# EAGLE board ARK+DOS+DA+SC (EAGLE 9.4.2), part 1 of 2
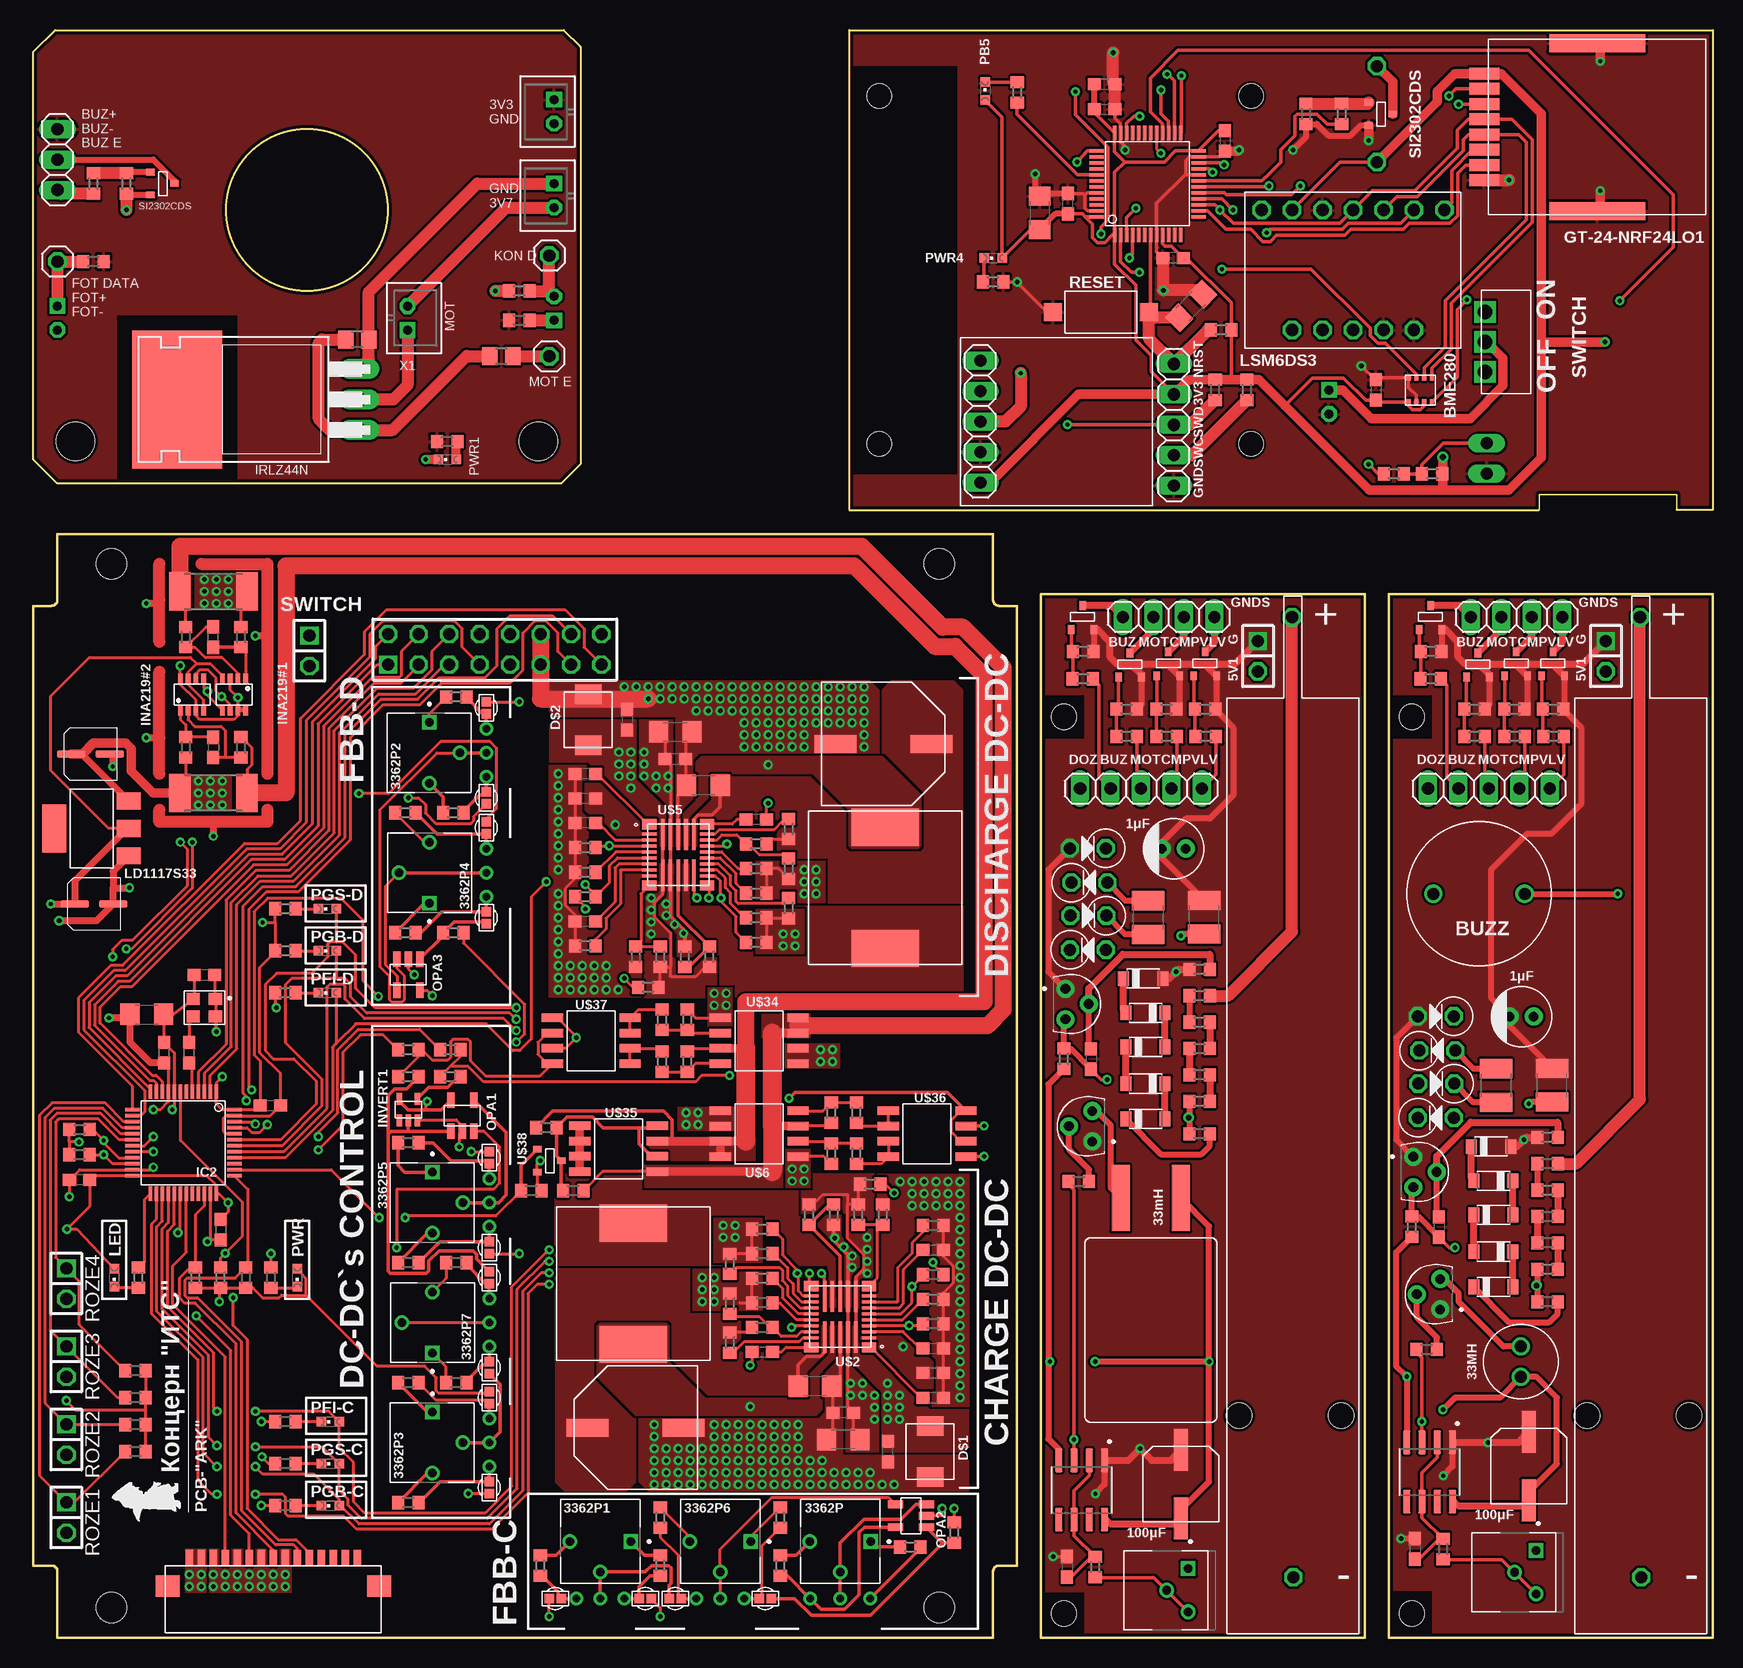
[diagram p0: board, top side]
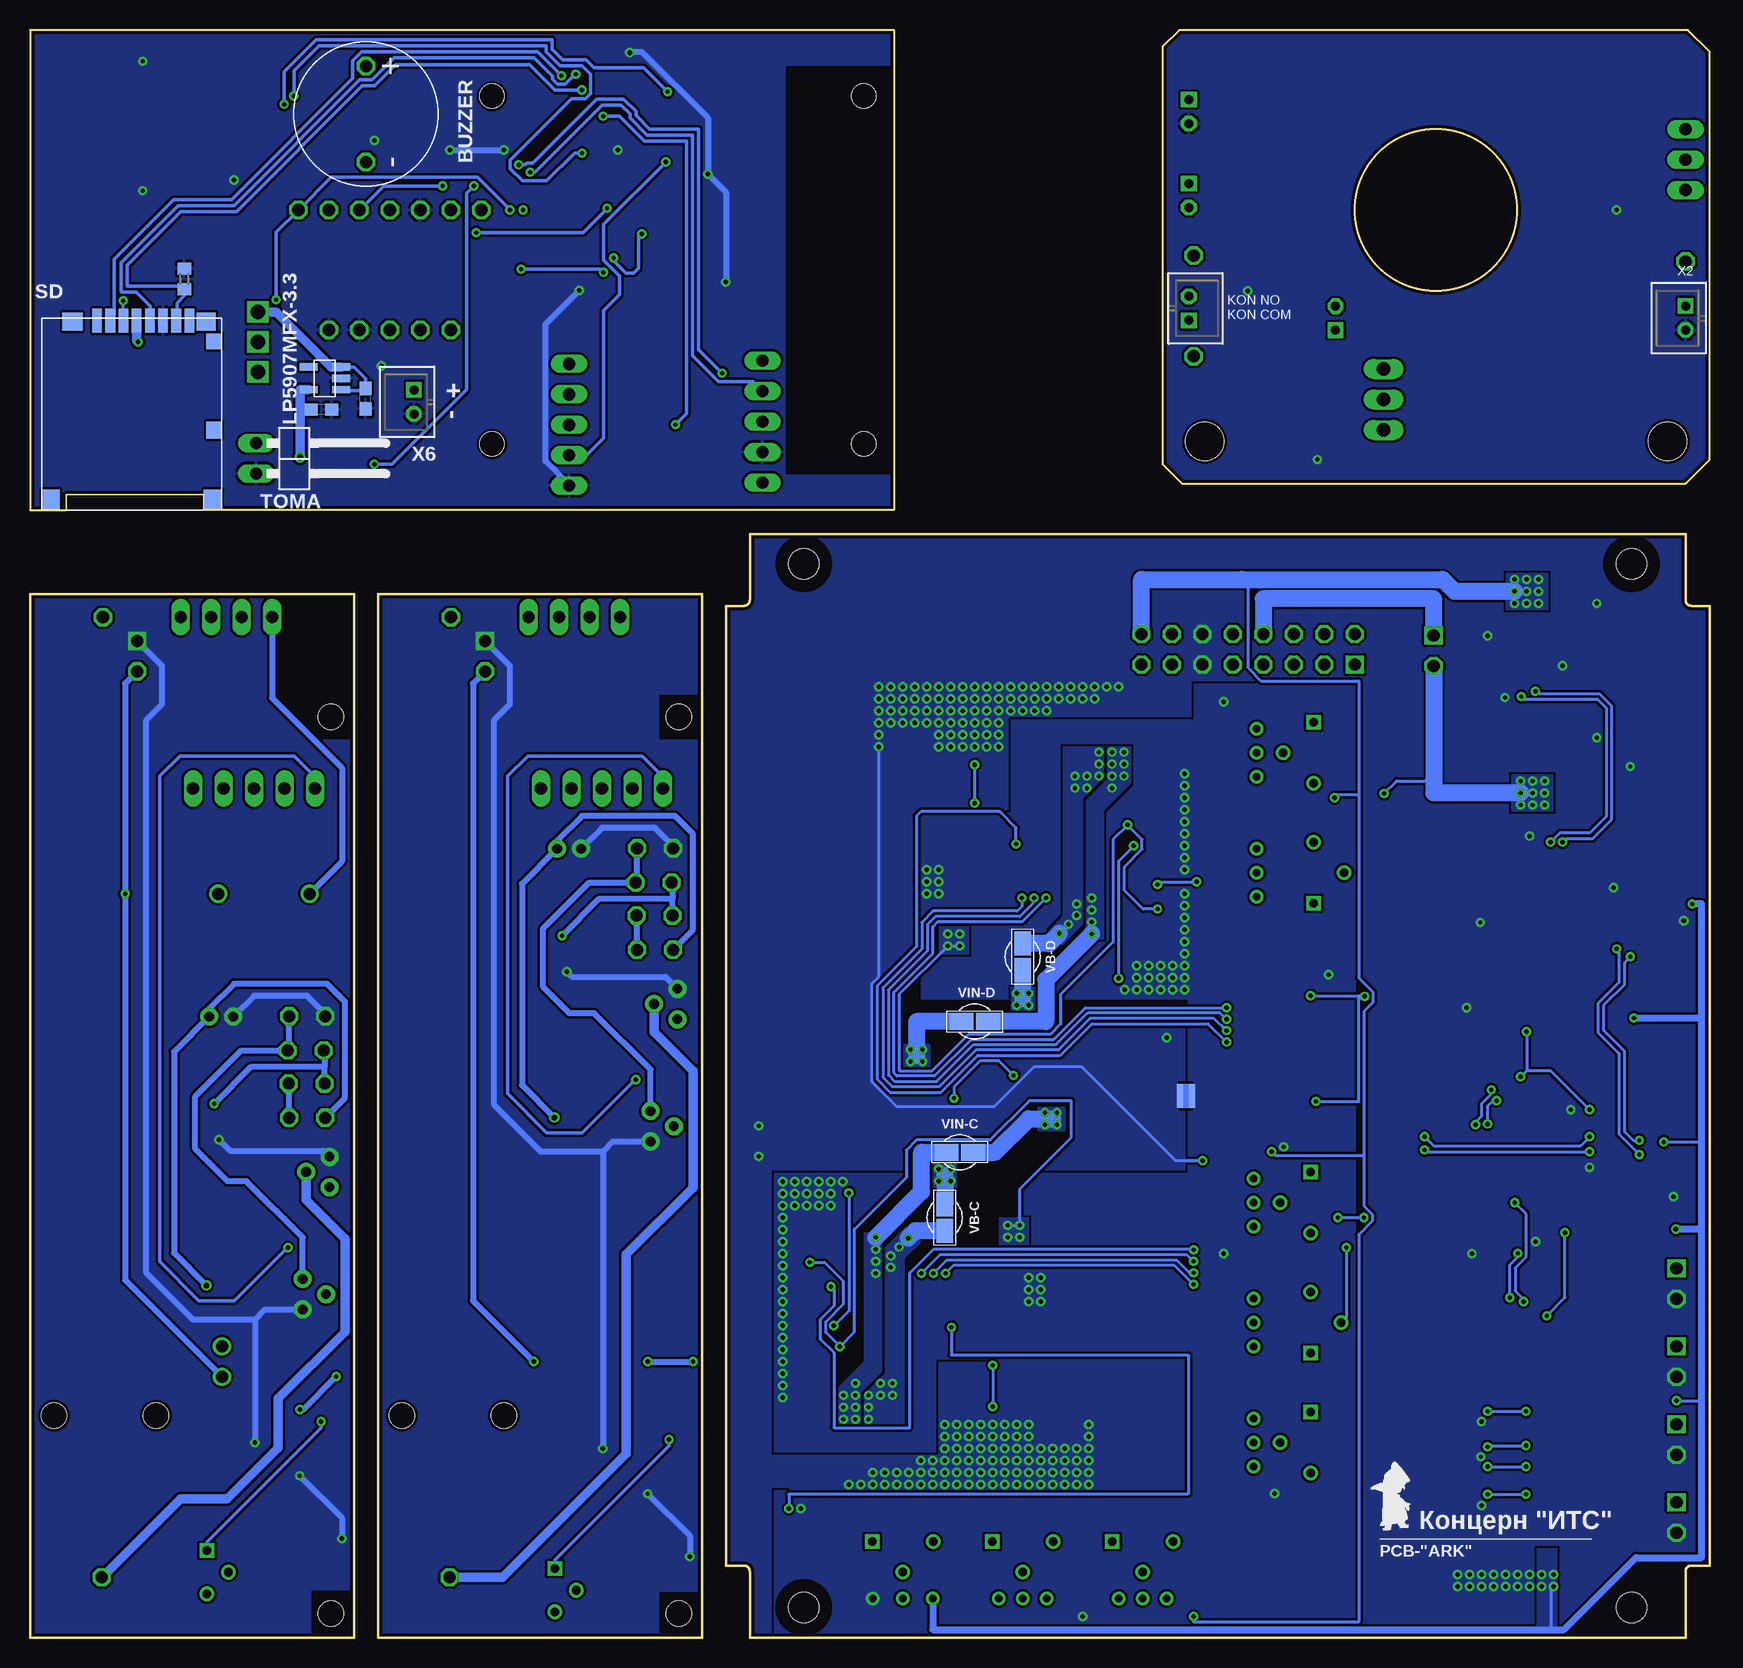
[diagram p1: board, bottom side, seen from below]

Size 140 x 134 mm. Coordinates in mm from the lower left corner, seen from the top.
Outline: 136.98,94 139.98,94 140,134 68,134 68,94 125.5,94
Outline: 0,98.2 0,132.2 1.8,134 44.2,134 45.6,132.6 45.6,97.8 44,96.2 2,96.2 0,98.2
Outline: 84,0 111,0 111,87 84,87 84,0
Outline: 113,0 140,0 140,87 113,87 113,0
Outline: 2,92 80,92 80,86.5 arc90 80.5,86 82,86 82,6 80.5,6 arc90 80,5.5 80,0 2,0 2,5.5 arc90 1.5,6 0,6 0,86 1.5,86 arc90 2,86.5 2,92
Outline: circle at 22.8,119 radius 6.75
Copper layers (1*16): Top 0.035mm / dielectric 1.5mm / Bottom 0.035mm
Design rules "default *": minimum track width 0.25mm, minimum drill 0.35mm, track to track 0.2mm, track to pad 0.2mm, pad to pad 0.2mm, via to via 0.2mm, smd to smd 0.2mm, copper to edge 0.25mm, drill to drill 0.2mm, minimum pad ring 10mil, minimum via ring 8mil, stop-mask expansion 4mil, vias tented up to drill 0mil, thermal gap 10mil
Holes 3.2 mm at 3.5,99.7 42.1,99.7
Holes 2.1 mm at 100.5,18.5 109,18.5 85.9,2 85.9,76.75 129.5,18.5 138,18.5 114.9,2 114.9,76.75
Holes 2 mm at 101.5,99.5 101.5,128.5 70.5,128.5 70.5,99.5
Holes 2.5 mm at 6.5,2.5 75.5,2.5 75.5,89.5 6.5,89.5
tRestrict: area 68,97 to 77,131; area 4.2,87.2 to 8.8,91.8; area 73.2,87.2 to 77.8,91.8; area 73.2,0.2 to 77.8,4.8; area 4.2,0.2 to 8.8,4.8
bRestrict: area 68,97 to 77,131; area 73.2,87.2 to 77.8,91.8; area 73.2,0.2 to 77.8,4.8; area 4.2,0.2 to 8.8,4.8; area 4.2,87.2 to 8.8,91.8

## Footprints (pad centres in the part's own frame; a part is rotated, then mirrored left to right if it is on the bottom)
TRIM_3362P-1-502LF = drill 0.714 square: 1 -2.54,0 | drill 0.714: 2 0,2.54; 3 2.54,0
BME280CHIP = smd 0.5 x 0.35: 1 1.025,0.975; 2 1.025,0.325; 3 1.025,-0.325; 4 1.025,-0.975; 5 -1.025,-0.975; 6 -1.025,-0.325; 7 -1.025,0.325; 8 -1.025,0.975
BUZZER = drill 1: P$1 -3.8,0; P$2 3.8,0
BUZZER-S8R12 = drill 1 octagon: P$1 -4,0; P$2 4,0
C0603 = smd 1.1 x 1: 1 -0.85,0; 2 0.85,0
C1206 = smd 1.6 x 1.8: 1 -1.4,0; 2 1.4,0
ECAP-SMD-D4 = smd 0.6 x 2.4: P+ 0,1.6; P- 0,-1.6
ECAP1000-CMD = smd 1.5 x 3.5: P$1 0,4; P$2 0,-4
ECAP100-CMD = smd 1.2 x 3.5: P$1 0,2.85; P$2 0,-2.85
ECAP1MK = drill 0.8 pad 1.5: P$1 -1,0; P$2 1,0
C1210 = smd 1.6 x 2.7: 1 -1.4,0; 2 1.4,0
1X01 = drill 1.016 octagon: 1 0,0
SOD123 = smd 0.91 x 1.22: A 1.635,0; C -1.635,0
SMB = smd 1.62 x 2.18: P$1 -2.11,0; P$2 2.11,0
1X05 = drill 1.016 long: 1 -5.08,0; 2 -2.54,0; 3 0,0; 4 2.54,0; 5 5.08,0
DOSIM_SBM20-1 = drill 1.016 octagon: P$1 -0.05,1.73; P$2 0.05,-78.3
1X04 = drill 1.016 long: 1 -3.81,0; 2 -1.27,0; 3 1.27,0; 4 3.81,0
GOOUUUATGM336H = drill 1.016 long: 1 6.35,-5.08; 2 6.35,-2.54; 3 6.35,0; 4 6.35,2.54; 5 6.35,5.08
GT-24-NRF24LO1 = smd 1 x 2.5: 1 4.445,9.4; 2 3.175,9.4; 3 1.905,9.4; 4 0.635,9.4; 5 -0.635,9.4; 6 -1.905,9.4; 7 -3.175,9.4; 8 -4.445,9.4 | smd 1.5 x 8: P$9 -7,0; P$10 7,0
LQFP48 = smd 0.3 x 1.2: 1 -2.75,-4.25; 2 -2.25,-4.25; 3 -1.75,-4.25; 4 -1.25,-4.25; 5 -0.75,-4.25; 6 -0.25,-4.25; 7 0.25,-4.25; 8 0.75,-4.25; 9 1.25,-4.25; 10 1.75,-4.25; 11 2.25,-4.25; 12 2.75,-4.25; 25 2.75,4.25; 26 2.25,4.25; 27 1.75,4.25; 28 1.25,4.25; 29 0.75,4.25; 30 0.25,4.25; 31 -0.25,4.25; 32 -0.75,4.25; 33 -1.25,4.25; 34 -1.75,4.25; 35 -2.25,4.25; 36 -2.75,4.25 | smd 1.2 x 0.3: 13 4.25,-2.75; 14 4.25,-2.25; 15 4.25,-1.75; 16 4.25,-1.25; 17 4.25,-0.75; 18 4.25,-0.25; 19 4.25,0.25; 20 4.25,0.75; 21 4.25,1.25; 22 4.25,1.75; 23 4.25,2.25; 24 4.25,2.75; 37 -4.25,2.75; 38 -4.25,2.25; 39 -4.25,1.75; 40 -4.25,1.25; 41 -4.25,0.75; 42 -4.25,0.25; 43 -4.25,-0.25; 44 -4.25,-0.75; 45 -4.25,-1.25; 46 -4.25,-1.75; 47 -4.25,-2.25; 48 -4.25,-2.75
SOT23-8 = smd 0.9 x 0.4: 1 -1.3,0.975; 2 -1.3,0.325; 3 -1.3,-0.325; 4 -1.3,-0.975; 5 1.3,-0.975; 6 1.3,-0.325; 7 1.3,0.325; 8 1.3,0.975
SC70 = smd 0.47 x 1: P$1 -0.75,-0.9; P$2 0,-0.9; P$3 0.75,-0.9; P$4 0.75,0.9; P$5 -0.75,0.9
TO220H = drill 1.118 long: 1 -2.54,-10.16; 2 0,-10.16; 3 2.54,-10.16 | smd 11.5 x 7.5: P$1 0,5
2X08 = drill 1.016 square: 1 -8.89,-1.27 | drill 1.016 octagon: 2 -8.89,1.27; 3 -6.35,-1.27; 4 -6.35,1.27; 5 -3.81,-1.27; 6 -3.81,1.27; 7 -1.27,-1.27; 8 -1.27,1.27; 9 1.27,-1.27; 10 1.27,1.27; 11 3.81,-1.27; 12 3.81,1.27; 13 6.35,-1.27; 14 6.35,1.27; 15 8.89,-1.27; 16 8.89,1.27
1X03 = drill 1.016 long: 1 -2.54,0; 2 0,0; 3 2.54,0
L_12X12 = smd 3.1 x 5.6: P$1 -5.05,0; P$2 5.05,0
SOT223 = smd 4 x 2: P$1 0,3.1 | smd 1.4 x 2: P$2 -2.29,-3.1; P$3 0,-3.1; P$4 2.29,-3.1
CHIPLED_0603 = smd 0.8 x 0.8: A 0,-0.75; C 0,0.75
5PINSOT23 = smd 0.6 x 1.5: 1 -0.95,-1.35; 2 0,-1.35; 3 0.95,-1.35; 4 0.95,1.35; 5 -0.95,1.35
LSM6DS3-GY = drill 1.016 octagon: P$1 -7.62,-5; P$2 -5.08,-5; P$3 -2.54,-5; P$4 0,-5; P$5 2.54,-5; P$6 5.08,-5; P$7 7.62,-5; P$8 -5.08,5; P$9 -2.54,5; P$10 0,5; P$11 2.54,5; P$12 5.08,5
SOT23-5 = smd 0.635 x 1.27: P$1 -0.95,-1.3; P$2 0,-1.3; P$3 0.95,-1.3; P$4 0.95,1.3; P$5 -0.95,1.3
1X02 = drill 1.016 square: 1 -1.27,0 | drill 1.016 octagon: 2 1.27,0
R0603 = smd 1 x 1.1: 1 -0.85,0; 2 0.85,0
R0805 = smd 1.3 x 1.5: 1 -0.95,0; 2 0.95,0
R2512 = smd 1.8 x 3.2: 1 -2.8,0; 2 2.8,0
SMDSWITCH = smd 1.5 x 1.5: 1 -4,0; 2 4,0
TO92/TO226 = drill 0.8 pad 1.5: 1 -1.27,-0.95; 2 0,1; 3 1.27,-0.95
SD = smd 0.8 x 2: CLK 6,-15.77; CMD 8.2,-15.77; DAT0 3.8,-15.77; DAT1 2.7,-15.77; DAT2 10.4,-15.77; DAT3 9.3,-15.77; VDD 7.1,-15.77; VSS 4.9,-15.77 | smd 1.5 x 1.7: P$9 0.75,-0.85; P$13 14.25,-0.85 | smd 1.6 x 1.5: P$10 1.3,-15.7 | smd 1.29 x 1.3: P$11 0.645,-14.05 | smd 1.29 x 1.4: P$12 0.645,-6.65 | smd 1.7 x 1.5: P$14 12.45,-15.7
SOT23-3 = smd 0.56 x 0.73: 1 -0.95,-1; 2 0.95,-1; 3 0,1
MSS12D01 = drill 1.2 square: FROM 0,0; TO1 2.5,0; TO2 -2.5,0
OC2E08000XCCDRX = smd 1.1 x 1: P$1 0.925,0.725; P$2 -0.925,0.725; P$3 -0.925,-0.725; P$4 0.925,-0.725
1X02/90 = drill 1.016 long: 1 -1.27,-3.81; 2 1.27,-3.81
SOIC127P599X175-8N = smd 1.97 x 0.6: 1 -2.47,1.905; 2 -2.47,0.635; 3 -2.47,-0.635; 4 -2.47,-1.905; 5 2.47,-1.905; 6 2.47,-0.635; 7 2.47,0.635; 8 2.47,1.905
SOLDERING-PAD-4A = smd 2 x 1.4: P$1 1.1,0; P$2 -1.1,0
QFN-30 = smd 1.2 x 0.85: 1 -2.4,2.55; 10 -2.4,-2.55; 16 2.4,-2.55; 25 2.4,2.55 | smd 1.2 x 0.25: 2 -2.4,1.75; 3 -2.4,1.25; 4 -2.4,0.75; 5 -2.4,0.25; 6 -2.4,-0.25; 7 -2.4,-0.75; 8 -2.4,-1.25; 9 -2.4,-1.75; 17 2.4,-1.75; 18 2.4,-1.25; 19 2.4,-0.75; 20 2.4,-0.25; 21 2.4,0.25; 22 2.4,0.75; 23 2.4,1.25; 24 2.4,1.75 | smd 0.3 x 2.6: 11 -1.3,-1.7; 12 -0.65,-1.7; 13 0,-1.7; 14 0.65,-1.7; 15 1.3,-1.7; 26 1.3,1.7; 27 0.65,1.7; 28 0,1.7; 29 -0.65,1.7; 30 -1.3,1.7
SO8 = smd 0.72 x 1.78: 1 -1.905,-3.23; 2 -0.635,-3.23; 3 0.635,-3.23; 4 1.905,-3.23; 5 1.905,3.23; 6 0.635,3.23; 7 -0.635,3.23; 8 -1.905,3.23
GNDS-CONNECTOR = smd 0.5 x 2: P$1 -0.5,0; P$2 0.5,0
BA159 = drill 1 octagon: P$1 -1.5,0; P$2 1.5,0
VIAS = drill 0.6: P$1 0,0
68611 = smd 0.6 x 1.3: P$1 -7,0.65; P$2 -6,0.65; P$3 -5,0.65; P$4 -4,0.65; P$5 -3,0.65; P$6 -2,0.65; P$7 -1,0.65; P$8 0,0.65; P$9 1,0.65; P$10 2,0.65; P$11 3,0.65; P$12 4,0.65; P$13 5,0.65; P$14 6,0.65; P$15 7,0.65 | smd 2 x 1.8: P$16 8.8,-1.7; P$17 -8.8,-1.7
VIAS-CONNECT = smd 0.8 x 0.8: 1 -0.5,0; 2 0.5,0
RCH114NP_- = smd 5.5 x 1.5: P$1 3.8,-2.5; P$2 3.8,2.5
33MH = drill 1: P$1 -1.27,0; P$2 1.27,0
TRIM_3362H-1-502LF = drill 0.714 square: 1 -1.8,1.8 | drill 0.714: 2 0,0; 3 1.8,1.8
B2B-PH-K-S = drill 0.75 pad 1.3 square: 1 1,0 | drill 0.75 pad 1.3 octagon: 2 -1,0

## Placement (x,y rotation side)
3362P  1k  [TRIM_3362P-1-502LF]  67.25,8 180 top
3362P1  1k  [TRIM_3362P-1-502LF]  47.25,8 180 top
3362P2  5k  [TRIM_3362P-1-502LF]  33,73.75 270 top
3362P3  500R  [TRIM_3362P-1-502LF]  33.25,16.25 270 top
3362P4  1k  [TRIM_3362P-1-502LF]  33,63.75 90 top
3362P5  5k  [TRIM_3362P-1-502LF]  33.25,36.25 270 top
3362P6  20k  [TRIM_3362P-1-502LF]  57.25,8 180 top
3362P7  20k  [TRIM_3362P-1-502LF]  33.25,26.25 90 top
BME280  BME280CHIP  [BME280CHIP]  115.6,104 90 top
BUZZ  BUZZER  [BUZZER]  120.5,62 0 top
BUZZER  BUZZERS8R6  [BUZZER-S8R12]  112,127 270 bottom
C1  1nF  [C0603]  13,48.75 90 top
C1.C  100nF  [C0603]  71.25,15.5 90 top
C1.D  100nF  [C0603]  49.5,76.5 270 top
C2  10nF  [C0603]  14.25,55.25 0 top
C2A.C  22µF  [C1206]  67.5,16.5 180 top
C2A.D  22µF  [C1206]  53.5,75.5 0 top
C2B.C  100nF  [C0603]  67.5,18.75 180 top
C2B.D  100nF  [C0603]  53.5,73.25 0 top
C3  100nF  [C0603]  86.16,5.9 270 top
C3.C  1µF  [C0603]  75,22.05 0 top
C3.D  1µF  [C0603]  46,69.95 180 top
C4  10uF  [ECAP-SMD-D4]  5.05,61.15 90 top
C4A.C  1µF  [C1206]  65.15,20.95 180 top
C4A.D  1µF  [C1206]  55.85,71.05 0 top
C4B.C  1000µF  [ECAP1000-CMD]  50.2,17.5 90 top
C4B.D  1000µF  [ECAP1000-CMD]  70.85,74.5 270 top
C5  100nF  [C0603]  19.75,44.35 0 top
C5.C  1µF  [C0603]  60.75,23.8 0 top
C5.D  1µF  [C0603]  60.25,68.2 180 top
C6  100nF  [C0603]  10.9,48.75 90 top
C6.C  10nF  [C0603]  75,20 0 top
C6.D  10nF  [C0603]  46,72 180 top
C7  100nF  [C0603]  3.85,38.15 180 top
C7.C  (10nF)  [C0603]  75,24.1 0 top
C7.D  (10nF)  [C0603]  46,67.9 180 top
C8  100nF  [C0603]  15.6,34 270 top
C8.C  (10nF)  [C0603]  75,32.3 0 top
C8.D  (10nF)  [C0603]  46,59.7 180 top
C9  0,1µ  [C0603]  15,83.4 90 top
C10  0,1µ  [C0603]  15,74.2 270 top
C11  1uF  [ECAP-SMD-D4]  4.75,73.65 90 top
C12  100μF  [ECAP100-CMD]  95.65,12.78 0 top
C13  1μF  [ECAP1MK]  95.06,65.76 180 top
C14  22nF  [C1210]  92.91,60.01 270 top
C15  22nF  [C1210]  97.59,60.04 90 top
C16  10µ  [C1206]  9.45,51.95 0 top
C17  100pF  [C0603]  88.16,48.22 270 top
C18  100nF  [C0603]  115.16,7.4 270 top
C19  100μF  [ECAP100-CMD]  124.65,14.28 0 top
C20  1μF  [ECAP1MK]  124.06,51.76 180 top
C21  22nF  [C1210]  121.91,46.01 270 top
C22  22nF  [C1210]  126.59,46.04 90 top
C23  100pF  [C0603]  117.16,34.22 270 top
C24  1μF  [C0603]  115.71,102.35 180 bottom
C25  100nF  [C0603]  86.25,119.52 90 top
C26  10µ  [C1206]  83.89,118.75 90 top
C27  100nF  [C0603]  111.9,104 270 top
C28  100nF  [C0603]  95,115 180 top
C29  100nF  [C0603]  99.3,124.75 270 top
C30  100nF  [C0603]  89.3,127.4 0 top
C31  100nF  [C0603]  89.3,129.5 0 top
C32  1μF  [C0603]  112.03,103.27 90 bottom
C33  10µ  [C1206]  96.5,111 45 top
COM  [1X01]  2,114.7 0 top
D1  MBR  [SOD123]  92.7,43.23 0 top
D2  MBR  [SOD123]  92.7,46.17 180 top
D3  MBR  [SOD123]  92.7,49.23 0 top
D4  MBR  [SOD123]  92.7,52.07 180 top
D5  MBR  [SOD123]  92.5,54.93 0 top
D6  MBR  [SOD123]  121.7,29.23 0 top
D7  MBR  [SOD123]  121.7,32.17 180 top
D8  MBR  [SOD123]  121.7,35.23 0 top
D9  MBR  [SOD123]  121.7,38.07 180 top
D10  MBR  [SOD123]  121.5,40.93 0 top
D$1  SMP100LC-8  [SMB]  74.75,15.5 90 top
D$2  SMP100LC-8  [SMB]  46.25,76.5 270 top
DEVICE  DEVICE  [1X05]  92.33,70.77 0 top
DEVICE1  DEVICE  [1X05]  121.33,70.77 0 top
DOSE  DOSE  [DOSIM_SBM20-1]  104.97,83.32 0 top
DOSE1  DOSE  [DOSIM_SBM20-1]  133.97,83.32 0 top
GND-DEVICE  GND-DEV  [1X04]  94.63,85.07 0 top
GND-DEVICE1  GND-DEVICE  [1X04]  123.63,85.07 0 top
GOOUUUATGM336H  GOOUUUATGM336H  [GOOUUUATGM336H]  85.29,101.36 180 top
GT-24-NRF24LO1  GT-24-NRF24LO1  [GT-24-NRF24LO1]  130.34,125.91 90 top
IC1  STM32F103  [LQFP48]  92.87,121.18 0 top
IC2  STM32F103C8T  [LQFP48]  12.5,41.25 180 top
INA219#1  INA219AID  [SOT23-8]  16.73,78.6 270 top
INA219#2  INA219AID  [SOT23-8]  13.22,78.6 90 top
INVERT1  INVERTER.  [SC70]  31.25,44 0 top
IRLZ44N  IRLZ44N  [TO220H]  17,103.2 90 top
JP1  [2X08]  38.46,82.37 0 top
JP2  [1X01]  43,106.8 180 top
JP3  [1X03]  2,123.2 90 top
JP4  [1X01]  43,115.2 0 top
JP5  [1X05]  95.06,101.09 90 top
L1.C  10µH  [L_12X12]  50,29.5 90 top
L1.D  10µH  [L_12X12]  71,62.5 270 top
LD1117S33  LD1117S33  [SOT223]  4.85,67.45 90 top
LED  [CHIPLED_0603]  6.75,30 180 top
LP5907MFX-3.3  [5PINSOT23]  115.43,104.96 90 bottom
LSM6DS3  LSM6DS3-GY  [LSM6DS3-GY]  110,114 180 top
OPA1  OPA333  [SOT23-5]  35.75,43.5 0 top
OPA2  OPA333  [SOT23-5]  73.15,10.15 90 top
OPA3  OPA333  [SOT23-5]  31.25,55.25 180 top
PB5  [CHIPLED_0603]  79.33,128.91 0 top
PFI-C  [CHIPLED_0603]  24.75,18 90 top
PFI-D  [CHIPLED_0603]  24.5,53.75 90 top
PGB-C  [CHIPLED_0603]  24.75,11 90 top
PGB-D  [CHIPLED_0603]  24.5,57.25 90 top
PGS-C  [CHIPLED_0603]  24.75,14.5 90 top
PGS-D  [CHIPLED_0603]  24.5,60.75 90 top
PWR  [CHIPLED_0603]  22,30 180 top
PWR1  [CHIPLED_0603]  34.5,98.2 90 top
PWR2  PWR  [1X02]  102.07,81.8 270 top
PWR3  PWR  [1X02]  131.07,81.8 270 top
PWR4  [CHIPLED_0603]  80,115 90 top
R1  10k  [R0603]  34.75,46.75 180 top
R1.C  62k  [R0603]  68.75,35.25 270 top
R1.D  62k  [R0603]  52.25,56.75 90 top
R2  10k  [R0603]  8.5,15.5 0 top
R2.C  10k  [R0603]  70.8,35.25 90 top
R2.D  10k  [R0603]  50.2,56.75 270 top
R3  100  [R0603]  34.75,49 0 top
R4  100  [R0603]  52.4,48 90 top
R5  100  [R0603]  52.4,51.5 90 top
R5.C  191k  [R0603]  60.75,25.85 0 top
R5.D  191k  [R0603]  60.25,66.15 180 top
R6  10k  [R0603]  8.5,17.75 0 top
R6.C  10k  [R0603]  58.05,27.85 90 top
R6.D  10k  [R0603]  62.95,64.1 270 top
R7  100  [R0603]  68.6,43.75 90 top
R7.C  17k8  [R0603]  75,34.35 180 top
R7.D  17k8  [R0603]  46,57.65 0 top
R8  10k  [R0603]  8.5,20 0 top
R8.C  (10k)  [R0603]  58.05,24.6 270 top
R8.D  (10k)  [R0603]  62.95,67.4 90 top
R9  10k  [R0603]  52.25,10 90 top
R9.C  200k  [R0603]  69.75,37.8 0 top
R9.D  200k  [R0603]  51.25,54.2 180 top
R10  10k  [R0603]  62.25,10 270 top
R10.C  11k  [R0603]  75,26.15 0 top
R10.D  11k  [R0603]  46,65.85 180 top
R11  34k8  [R0603]  62.25,6 270 top
R11.C  100k  [R0603]  64.65,35.25 90 top
R11.D  100k  [R0603]  56.35,56.75 270 top
R12  10k  [R0603]  73.1,7.55 180 top
R12.C  100k  [R0603]  66.7,35.25 90 top
R12.D  100k  [R0603]  54.3,56.75 270 top
R13  91k  [R0603]  42.25,6 270 top
R13.C  100k  [R0603]  75,28.2 180 top
R13.D  100k  [R0603]  46,63.8 0 top
R14  10k  [R0603]  52.25,6 90 top
R14.C  100k  [R0603]  75,30.25 180 top
R14.D  100k  [R0603]  46,61.75 0 top
R15  10k  [R0603]  76.75,8.75 90 top
R15.C  100k  [R0603]  60.75,34.05 180 top
R15.D  100k  [R0603]  60.25,57.95 0 top
R16  2k  [R0603]  21,18 0 top
R16.C  10k  [R0603]  60.75,32 180 top
R16.D  10k  [R0603]  60.25,60 0 top
R17  2k  [R0603]  21,14.5 0 top
R17.C  10k  [R0603]  58.05,31.15 90 top
R17.D  10k  [R0603]  62.95,60.8 270 top
R18  2k  [R0603]  21,11 0 top
R18.C  51k  [R0603]  60.75,27.9 180 top
R18.D  51k  [R0603]  60.25,64.1 0 top
R19  51k  [R0603]  31,68.75 180 top
R19.C  (1M)  [R0603]  60.75,29.95 180 top
R19.D  (1M)  [R0603]  60.25,62.05 0 top
R20  51k  [R0603]  35,68.75 0 top
R21  10k  [R0603]  35.25,78.4 180 top
R22  2k  [R0603]  31,58.75 0 top
R23  2k  [R0603]  21,53.75 0 top
R24  2k  [R0603]  21,60.75 0 top
R25  10k  [R0603]  35,58.75 0 top
R26  2k  [R0603]  21,57.25 0 top
R27  10k  [R0603]  17.7,30 90 top
R28  100  [R0603]  68.6,40.35 90 top
R29  10k  [R0603]  66.5,43.75 90 top
R30  100R  [R0603]  5,121.2 90 top
R31  10k  [R0603]  66.5,40.35 90 top
R32  10K  [R0603]  7.75,121.2 270 top
R33  5k1  [R0603]  5,114.7 0 top
R34  10k  [R0603]  54.5,48 270 top
R35  10k  [R0603]  54.5,51.5 270 top
R36  10k  [R0603]  40.5,112.25 180 top
R37  100R  [R0603]  40.5,109.8 0 top
R38  10k  [R0603]  31.25,46.75 0 top
R39  100  [R0603]  31.25,49 180 top
R40  10k  [R0603]  42.75,42.5 0 top
R41  10k  [R0603]  45,37.25 180 top
R42  10k  [R0603]  41.5,37.25 180 top
R43  2k  [R0603]  31.25,11.25 0 top
R44  1k  [R0603]  31.25,21.25 180 top
R45  10k  [R0603]  31.25,31.25 0 top
R46  24k9  [R0603]  31.25,41.25 180 top
R47  620k  [R0603]  35.25,31.25 180 top
R48  10k  [R0603]  35.25,21.25 0 top
R49  10k  [R0603]  8.5,22.25 0 top
R50  1k  [R0603]  34.5,99.7 0 top
R51  100R  [R0805]  39,106.8 180 top
R52  10K  [R0805]  27,108.2 180 top
R53  1k  [R0603]  88.51,5.88 90 top
R54  3k3  [R0603]  85.89,48.24 90 top
R55  10k  [R0603]  97.68,77.39 180 top
R56  100R  [R0603]  97.72,75.11 0 top
R57  100R  [R0603]  94.47,75.11 0 top
R58  10k  [R0603]  94.44,77.39 180 top
R59  10k  [R0603]  91.12,77.39 180 top
R60  100R  [R0603]  91.12,75.11 0 top
R61  10k  [R0603]  87.5,82.19 180 top
R62  100R  [R0603]  87.47,79.91 0 top
R63  4k7  [R0603]  87.14,38.01 0 top
R64  10k  [R0603]  13.5,30 90 top
R65  22k  [R0603]  97.2,41.99 0 top
R66  1M  [R0603]  97.2,44.7 0 top
R67  1M  [R0603]  97.2,46.9 0 top
R68  1M  [R0603]  97.2,49.1 0 top
R69  1M  [R0603]  97.2,51.3 0 top
R70  1M  [R0603]  97.2,53.5 0 top
R71  R01  [R2512]  15,87.2 0 top
R72  100k  [R0603]  97.2,55.7 0 top
R73  10R  [R0603]  17.3,83.4 270 top
R74  10R  [R0603]  12.7,83.4 270 top
R75  R01  [R2512]  15,70.4 180 top
R76  10R  [R0603]  12.7,74.2 90 top
R77  10R  [R0603]  17.3,74.2 270 top
R78  1k  [R0603]  117.51,7.38 90 top
R79  10k  [R0603]  15.6,30 90 top
R80  3k3  [R0603]  114.89,34.24 90 top
R81  2k  [R0603]  8.75,30 270 top
R82  2k  [R0603]  19.8,30 270 top
R83  10k  [R0603]  126.68,77.39 180 top
R84  100R  [R0603]  126.72,75.11 0 top
R85  100R  [R0603]  123.47,75.11 0 top
R86  10k  [R0603]  123.44,77.39 180 top
R87  10k  [R0603]  120.12,77.39 180 top
R88  100R  [R0603]  120.12,75.11 0 top
R89  10k  [R0603]  116.5,82.19 180 top
R90  100R  [R0603]  116.47,79.91 0 top
R91  4k7  [R0603]  116.14,24.01 0 top
R92  22k  [R0603]  126.2,27.99 0 top
R93  1M  [R0603]  126.2,30.7 0 top
R94  1M  [R0603]  126.2,32.9 0 top
R95  1M  [R0603]  126.2,35.1 0 top
R96  1M  [R0603]  126.2,37.3 0 top
R97  1M  [R0603]  126.2,39.5 0 top
R98  100k  [R0603]  126.2,41.7 0 top
R99  100R  [R0603]  109.05,127 90 top
R100  10k  [R0603]  106.07,127 90 top
R101  5k1  [R0603]  3.85,42.35 0 top
R102  5k1  [R0603]  3.85,40.25 0 top
R103  5k1  [R0603]  101.15,104 270 top
R104  100R  [R0603]  113.4,97 180 top
R105  10K  [R0603]  127.13,113.25 90 bottom
R106  10K  [R0603]  116.6,97 0 top
R107  5k1  [R0603]  98.5,104 270 top
R108  1k  [R0603]  82,128.79 90 top
R109  1k  [R0603]  80,113 180 top
R110  5k1  [R0603]  99,109 180 top
RESET  SMDSWITCH  [SMDSWITCH]  89,110.5 180 top
ROZE1  [1X02]  2.75,10 270 top
ROZE2  [1X02]  2.75,16.5 270 top
ROZE3  [1X02]  2.75,23 270 top
ROZE4  [1X02]  2.75,29.5 270 top
RT1  2N6517  [TO92/TO226]  87.32,42.61 90 top
RT2  BC546  [TO92/TO226]  86.98,52.81 270 top
RT3  2N6517  [TO92/TO226]  116.32,28.61 90 top
RT4  BC546  [TO92/TO226]  115.98,38.81 270 top
SD  SD-SPI  [SD]  124.01,94 180 bottom
SI2302-1  SI2302CDS  [SOT23-3]  87.46,85.03 0 top
SI2302-2  SI2302CDS  [SOT23-3]  91.41,81.06 0 top
SI2302-3  SI2302CDS  [SOT23-3]  94.59,81.16 0 top
SI2302-4  SI2302CDS  [SOT23-3]  97.67,81.16 0 top
SI2302-5  SI2302CDS  [SOT23-3]  116.46,85.03 0 top
SI2302-6  SI2302CDS  [SOT23-3]  126.67,81.16 0 top
SI2302-7  SI2302CDS  [SOT23-3]  123.59,81.16 0 top
SI2302-8  SI2302CDS  [SOT23-3]  120.41,81.06 0 top
SI2302CDS  SI2302CDS  [SOT23-3]  10.75,121.2 270 top
SI2302CDS1  SI2302CDS  [SOT23-3]  112.3,127 270 top
SWITCH  [1X02]  23,82.25 270 top
SWITCH1  MSS12D01  [MSS12D01]  121,108 270 top
TCXO  OC2E08000XCCDRX  [OC2E08000XCCDRX]  14.25,52.5 0 top
TOMA  [1X02/90]  117.33,98.28 270 bottom
U1  LMC555  [SOIC127P599X175-8N]  87.38,12.3 270 top
U2  LMC555  [SOIC127P599X175-8N]  116.38,13.8 270 top
U$1  VIN-C  [SOLDERING-PAD-4A]  62.5,40.45 0 bottom
U$2  MP5515  [QFN-30]  67.25,26.75 180 top
U$3  PCB-"ARK"  [ITS-LOGO]  12.95,10.45 90 top
U$4  PCB-"ARK"  [ITS-LOGO]  27.5,8.25 0 bottom
U$5  MP5515  [QFN-30]  53.75,65.25 0 top
U$6  IRF7329PBF  [SO8]  60.5,42 90 top
U$7  GNDS-CONNECTOR  [GNDS-CONNECTOR]  43.65,45.15 0 bottom
U$8  BA159  [BA159]  87.89,65.79 0 top
U$9  [VIAS]  37.75,61.75 270 top
U$10  IN-  [VIAS]  37.75,63.75 270 top
U$11  [VIAS]  37.75,65.75 270 top
U$12  FFC-CONNECT68611  [68611]  20,6 0 top
U$13  OUT  [VIAS-CONNECT]  37.75,60 90 top
U$14  BMS+  [VIAS-CONNECT]  37.75,67.5 270 top
U$15  BUS+  [VIAS-CONNECT]  37.75,70 270 top
U$16  AGND  [VIAS-CONNECT]  37.75,77.5 270 top
U$17  [VIAS]  37.75,75.75 270 top
U$18  [VIAS]  37.75,71.75 270 top
U$19  IN+  [VIAS]  37.75,73.75 270 top
U$20  AGND  [VIAS-CONNECT]  51,3.25 0 top
U$21  BUS+  [VIAS-CONNECT]  43.5,3.25 0 top
U$22  [VIAS]  49.25,3.25 0 top
U$23  VB-C  [SOLDERING-PAD-4A]  63.75,35 90 bottom
U$24  [VIAS]  45.25,3.25 0 top
U$25  REF  [VIAS]  47.25,3.25 0 top
U$26  REF  [VIAS-CONNECT]  53.5,3.25 0 top
U$27  [VIAS]  55.25,3.25 0 top
U$28  IN-  [VIAS]  57.25,3.25 0 top
U$29  OUT  [VIAS-CONNECT]  61,3.25 180 top
U$30  [VIAS]  59.25,3.25 0 top
U$31  3V3  [VIAS]  64.75,3.25 0 top
U$32  IN+  [VIAS]  67.25,3.25 0 top
U$33  AGND  [VIAS]  69.75,3.25 0 top
U$34  IRF7329PBF  [SO8]  60.5,49.75 270 top
U$35  IRF7329PBF  [SO8]  48.77,40.75 90 top
U$36  IRF7905PBF  [SO8]  74.5,42 90 top
U$37  IRF7905PBF  [SO8]  46.5,49.75 270 top
U$38  SI2302CDS  [SOT23-3]  43,39.75 270 top
U$39  AGND  [VIAS-CONNECT]  38,12.5 270 top
U$40  3V3  [VIAS-CONNECT]  38,20 270 top
U$41  [VIAS]  38,18.25 270 top
U$42  [VIAS]  38,14.25 270 top
U$43  REF  [VIAS]  38,16.25 270 top
U$44  AGND  [VIAS-CONNECT]  38,32.5 270 top
U$45  BUS+  [VIAS-CONNECT]  38,40 270 top
U$46  [VIAS]  38,38.25 0 top
U$47  [VIAS]  38,34.25 0 top
U$48  IN-  [VIAS]  38,36.25 0 top
U$49  OUT-D  [VIAS-CONNECT]  38,30 270 top
U$50  [VIAS]  38,28.25 90 top
U$51  IN+  [VIAS]  38,26.25 90 top
U$52  REF  [VIAS-CONNECT]  38,22.5 90 top
U$53  [VIAS]  38,24.25 90 top
U$54  VIN-D  [SOLDERING-PAD-4A]  61.25,51.35 180 bottom
U$55  VB-D  [SOLDERING-PAD-4A]  57.25,56.75 270 bottom
U$56  BA159  [BA159]  88.01,62.93 180 top
U$57  BA159  [BA159]  87.94,60.17 0 top
U$58  BA159  [BA159]  87.91,57.33 180 top
U$59  33mH  [RCH114NP_-]  93.15,32.83 90 top
U$60  BA159  [BA159]  116.89,51.79 0 top
U$61  BA159  [BA159]  117.01,48.93 180 top
U$62  BA159  [BA159]  116.94,46.17 0 top
U$63  BA159  [BA159]  116.91,43.33 180 top
U$64  33MH  [33MH]  124,23 90 top
VR1  3362H  [TRIM_3362H-1-502LF]  94.45,3.94 270 top
VR2  3362H  [TRIM_3362H-1-502LF]  123.45,5.44 270 top
X1  JST-2-KL  [B2B-PH-K-S]  31.18,109.98 270 top
X2  JST-2-KL  [B2B-PH-K-S]  2,109.99 90 bottom
X3  JST-2-KL  [B2B-PH-K-S]  43.4,110.8 270 bottom
X4  JST-2-KL  [B2B-PH-K-S]  43.4,127.2 90 top
X5  JST-2-KL  [B2B-PH-K-S]  43.4,120.2 90 top
X6  JST-2-K-S  [B2B-PH-K-S]  108,103 90 bottom

## Library data of the parts
3362P 3362P1-3362P7 VR1 VR2 = CanCubeSat; AVAILABILITY: Good; DESCRIPTION: 5 kOhms 0.5W, 1/2W PC Pins Through Hole Trimmer Potentiometer Cermet 1 Turn Top Adjustment; MF: Bourns; MP: 3362P-1-502LF; PACKAGE: 3362P-1 Bourns Inc.; PRICE: None; PURCHASE-URL: https://pricing.snapeda.com/search/part/3362P-1-502LF/?ref=eda
BME280 BUZZ BUZZER C4 C4B.C C4B.D C11-C13 C19 C20 D$1 D$2 DOSE DOSE1 GOOUUUATGM336H GT-24-NRF24LO1 IC1 IC2 INA219#1 INA219#2 INVERT1 IRLZ44N L1.C L1.D LD1117S33 LP5907MFX-3.3 LSM6DS3 OPA1-OPA3 PWR2 PWR3 SD SI2302-1-SI2302-8 SI2302CDS SI2302CDS1 SWITCH1 TCXO U$1-U$64 X1-X6 = CanCubeSat
C1 C1.C C1.D C2 C2A.C C2A.D C2B.C C2B.D C3 C3.C C3.D C4A.C C4A.D C5 C5.C C5.D C6 C6.C C6.D C7 C7.C C7.D C8 C8.C C8.D C9 C10 C14-C18 C21-C33 = rcl; SPICEPREFIX: C
COM DEVICE DEVICE1 GND-DEVICE GND-DEVICE1 JP2-JP5 TOMA = pinhead
D1-D10 = CanCubeSat; AVAILABILITY: Good; DESCRIPTION: Diode Schottky 20V 500mA Surface Mount SOD-123; MF: ON Semiconductor; MP: MBR0520LT1G; PACKAGE: SOD-123-2 ON Semiconductor; PRICE: None; PURCHASE-URL: https://pricing.snapeda.com/search/part/MBR0520LT1G/?ref=eda
JP1 ROZE1-ROZE4 SWITCH = pinheadCS
LED PB5 PFI-C PFI-D PGB-C PGB-D PGS-C PGS-D PWR PWR1 PWR4 = led
R1-R29 R31 R34 R35 R38-R50 R64 R73 R74 R76 R77 R79 R81 R82 R101-R103 R107-R110 = resistor
R1.C R1.D R2.C R2.D R5.C R5.D R6.C R6.D R7.C R7.D R8.C R8.D R9.C R9.D R10.C R10.D R11.C R11.D R12.C R12.D R13.C R13.D R14.C R14.D R15.C R15.D R16.C R16.D R17.C R17.D R18.C R18.D R19.C R19.D R30 R32 R33 R36 R37 R51-R63 R65-R72 R75 R78 R80 R83-R100 R104-R106 = rcl; SPICEPREFIX: R
RESET = GC
RT1-RT4 = CanCubeSat; AVAILABILITY: Bad; DESCRIPTION: Temperature Sensor Digital, Local -55°C ~ 125°C 9 b TO-92-3; MF: Maxim Integrated; MP: DS1820; PACKAGE: TO-226-3 Maxim; PRICE: None
U1 U2 = LMC555CMX_NOPB; AVAILABILITY: In Stock; DESCRIPTION: Worlds smallest 555 timer with low power, high accuracy and a Fmax of 3MHz 8-SOIC -40 to 85; MF: Texas Instruments; MP: LMC555CMX; PACKAGE: SOIC-8 Texas Instruments; PRICE: None

## Nets
0V8: 3362P.2 OPA2.P$3 U$32.P$1
1W: IC2.14 JP1.7
3V1: JP3.3 R33.2 R37.1 R50.1 X4.1
3V2: BME280.6 BME280.8 BUZZER.P$2 C24.2 C25.1 C26.1 C27.2 C28.1 C29.1 C30.1 C31.1 GOOUUUATGM336H.5 GT-24-NRF24LO1.1 IC1.1 IC1.9 IC1.24 IC1.36 IC1.48 JP5.4 LP5907MFX-3.3.5 LSM6DS3.P$6 PB5.A PWR4.A R103.1 R106.2 R107.1 R110.1 SD.VDD
3V3: C2.2 C4.P+ C5.1 C6.1 C7.1 C8.1 C16.1 IC2.1 IC2.9 IC2.24 IC2.36 IC2.48 INA219#1.4 INA219#2.4 INA219#2.7 INVERT1.P$5 LD1117S33.P$3 LED.A OPA1.P$5 OPA2.P$5 OPA3.P$5 PWR.A R2.2 R6.2 R8.2 R11.2 R27.1 R49.2 R64.1 R79.1 R101.1 R102.1 TCXO.P$1 TCXO.P$4 U$12.P$1 U$12.P$2 U$31.P$1 U$40.1
3V7: C32.2 LP5907MFX-3.3.1 LP5907MFX-3.3.3 SWITCH1.TO2
3V7-OUT: SWITCH1.FROM X6.1
5V1: C12.P$2 PWR2.2 R54.1 U1.4 U1.8 U$59.P$1
5V3: BUZZ.P$2 C19.P$2 PWR3.2 R80.1 U2.4 U2.8 U$64.P$1
A: INVERT1.P$2 OPA1.P$1 R38.2 U$49.1
AGND: C3.C.2 C3.D.2 C6.C.2 C6.D.2 C7.C.2 C7.D.2 C8.C.2 C8.D.2 INVERT1.P$3 OPA1.P$2 OPA2.P$2 OPA3.P$2 R2.C.2 R2.D.2 R6.C.2 R6.D.2 R7.C.1 R7.D.1 R10.C.2 R10.D.2 R12.1 R13.C.1 R13.D.1 R18.C.2 R18.D.2 R19.C.2 R19.D.2 U$2.9 U$5.9 U$7.P$2 U$16.1 U$20.2 U$33.P$1 U$39.2 U$44.2
BMS1: IC2.11 JP1.1
BMS2: IC2.12 JP1.2
BMS3: IC2.4 JP1.3
BMS4: IC2.10 JP1.4
BMS5: IC2.2 JP1.5
BMS6: IC2.3 JP1.6
BMS+: C11.P+ LD1117S33.P$4 R75.2 R76.1 SWITCH.2 U$14.1
BMS+_OUT: JP1.8 SWITCH.1
BUS+: JP1.16 R71.2 R73.1 U$15.2 U$21.1 U$45.1
BUZZER: DEVICE.2 R62.2
BUZZER1: DEVICE1.2 R90.2
C-OFF: IC2.19 R3.1
CE-NRF24LO1: GT-24-NRF24LO1.2 IC1.29
D-OFF: IC2.20 R39.2
DC-DC: IC2.38 R42.2 U$38.1
DOZIMETR: C17.2 DEVICE.1 R54.2 RT2.3
DOZIMETR1: C23.2 DEVICE1.1 R80.2 RT4.3
DVIG: DEVICE.4 R57.2
DVIG1: DEVICE1.4 R85.2
FBB-C: R15.2 U$2.22
FBB-D: R25.2 U$5.22
GND: C1.C.1 C1.D.1 C2.1 C2A.C.2 C2A.D.2 C2B.C.2 C2B.D.2 C4.P- C4A.C.1 C4A.D.1 C4B.C.P$2 C4B.D.P$2 C5.2 C6.2 C7.2 C8.2 C11.P- C16.2 D$1.P$1 D$2.P$1 IC2.8 IC2.23 IC2.35 IC2.44 IC2.47 INA219#1.3 INA219#1.7 INA219#1.8 INA219#2.3 INA219#2.8 JP1.11 JP1.12 LD1117S33.P$2 R16.1 R17.1 R18.1 R23.1 R24.1 R26.1 R42.1 R82.1 ROZE1.2 ROZE2.2 ROZE3.2 ROZE4.2 TCXO.P$2 U$2.28 U$5.28 U$7.P$1 U$12.P$3 U$12.P$5 U$12.P$7 U$12.P$9 U$36.1 U$36.3 U$37.1 U$37.3 U$38.2
GND1: PWR1.C R32.2 R36.2 SI2302CDS.2 X2.2 X4.2
GND2: C3.1 C12.P$1 C13.P$2 C15.2 D5.A PWR2.1 R55.1 R58.1 R59.1 R61.1 R72.1 RT1.1 RT2.1 SI2302-1.2 SI2302-2.2 SI2302-3.2 SI2302-4.2 U1.1 U$8.P$1
GND4: C18.1 C19.P$1 C20.P$2 C22.2 D10.A PWR3.1 R83.1 R86.1 R87.1 R89.1 R98.1 RT3.1 RT4.1 SI2302-5.2 SI2302-6.2 SI2302-7.2 SI2302-8.2 U2.1 U$60.P$1
GND6: BME280.1 BME280.7 C24.1 C25.2 C26.2 C27.1 C28.2 C29.2 C30.2 C31.2 C32.1 C33.2 GOOUUUATGM336H.4 GT-24-NRF24LO1.8 GT-24-NRF24LO1.P$9 GT-24-NRF24LO1.P$10 IC1.8 IC1.20 IC1.23 IC1.35 IC1.44 IC1.47 JP5.1 LP5907MFX-3.3.2 LSM6DS3.P$5 LSM6DS3.P$8 LSM6DS3.P$9 R100.1 R105.2 R109.1 RESET.2 SD.VSS SI2302CDS1.2 TOMA.2 X6.2
GND-BUZZER: GND-DEVICE.1 SI2302-1.3
GND-BUZZER1: BUZZ.P$1 GND-DEVICE1.1 SI2302-5.3
GND-DVIG: GND-DEVICE.3 SI2302-3.3
GND-DVIG1: GND-DEVICE1.3 SI2302-7.3
GND-MOTOR: GND-DEVICE.2 SI2302-2.3
GND-MOTOR1: GND-DEVICE1.2 SI2302-8.3
GND-VALVE: GND-DEVICE.4 SI2302-4.3
GND-VALVE1: GND-DEVICE1.4 SI2302-6.3
INA_BMS+: R34.1 R40.1 R75.1 R77.1 U$6.7 U$6.8 U$34.3 U$35.3
INA_BUS+: R29.1 R41.1 R71.1 R74.1 U$6.3 U$34.7 U$34.8 U$35.1
INT-C: IC2.26 R15.C.1 U$2.17
INT-D: IC2.41 R15.D.1 U$5.17
IRQ-NRF24LO1: GT-24-NRF24LO1.7 IC1.14
LED: IC2.25 R81.1
MOTOR: DEVICE.3 R60.2
MOTOR1: DEVICE1.3 R88.2
N$1: C1.1 IC2.5
N$2: U$1.P$1 U$6.5 U$6.6
N$3: R31.1 U$6.1 U$23.P$1
N$4: C1.2 TCXO.P$3
N$5: R4.1 R34.2 U$34.4
N$6: OPA3.P$1 R25.1 U$13.1
N$7: R11.C.1 R12.C.2 U$2.13
N$8: R7.C.2 U$2.8
N$9: C7.C.1 U$2.3
N$10: R1.C.2 R2.C.1 U$2.10
N$11: R9.C.2 R10.C.1 U$2.4
N$12: C8.C.1 U$2.7
N$13: R18.C.1 U$2.21
N$14: C9.2 INA219#1.2 R74.2
N$15: R19.C.1 U$2.20
N$16: R13.C.2 U$2.5
N$17: LED.C R81.2
N$18: C6.C.1 U$2.1
N$19: C4A.C.2 C4B.C.P$1 R5.C.1 R8.C.1 U$2.26
N$20: C5.C.2 U$2.25
N$21: C5.C.1 L1.C.P$1 U$2.27
N$22: R5.C.2 R6.C.1 U$2.23
N$23: R8.C.2 U$2.24
N$24: 3362P4.1 R22.1
N$25: R7.2 R29.2 U$6.4
N$26: R17.C.1 U$2.19
N$27: R16.C.1 U$2.18
N$28: R5.1 R35.2 U$34.2
N$29: 3362P2.2 OPA3.P$3 U$19.P$1
N$30: R11.D.1 R12.D.2 U$5.13
N$31: R1.D.2 R2.D.1 U$5.10
N$32: R9.D.2 R10.D.1 U$5.4
N$33: R7.D.2 U$5.8
N$34: C7.D.1 U$5.3
N$35: C8.D.1 U$5.7
N$36: R18.D.1 U$5.21
N$37: R19.D.1 U$5.20
N$38: R13.D.2 U$5.5
N$39: C6.D.1 U$5.1
N$40: C5.D.2 U$5.25
N$41: C5.D.1 L1.D.P$1 U$5.27
N$42: R5.D.2 R6.D.1 U$5.23
N$43: R8.D.2 U$5.24
N$44: C4A.D.2 C4B.D.P$1 R5.D.1 R8.D.1 U$5.26
N$45: IRLZ44N.2 X1.1
N$46: U$35.5 U$35.6 U$35.7 U$35.8
N$47: R17.D.1 U$5.19
N$48: R1.2 R3.2 U$36.2 U$36.4
N$49: R16.D.1 U$5.18
N$50: U$34.5 U$34.6 U$54.P$1
N$51: R38.1 R39.1 U$37.2 U$37.4
N$52: OPA2.P$1 R15.1 U$29.1
N$53: 3362P6.2 OPA2.P$4 U$28.P$1
N$54: 3362P6.3 R9.2
N$55: 3362P6.1 R10.1
N$56: PFI-C.C R16.2
N$57: 3362P.3 R11.1
N$58: 3362P.1 R12.2
N$59: 3362P1.3 R13.1
N$60: 3362P1.1 R14.2
N$61: 3362P1.2 U$25.P$1 U$26.1
N$62: 3362P2.3 R20.1
N$63: PGS-C.C R17.2
N$64: 3362P2.1 R21.2
N$65: PGB-C.C R18.2
N$66: 3362P4.2 OPA3.P$4 U$10.P$1
N$67: 3362P4.3 R19.2
N$68: PFI-D.C R23.2
N$69: PGS-D.C R24.2
N$70: PGB-D.C R26.2
N$71: R22.2 U$9.P$1 U$13.2
N$72: R19.1 U$11.P$1 U$14.2
N$73: R20.2 U$15.1 U$18.P$1
N$74: R21.1 U$16.2 U$17.P$1
N$75: R13.2 U$21.2 U$24.P$1
N$76: R14.1 U$20.1 U$22.P$1
N$77: R35.1 U$34.1 U$55.P$1
N$78: R5.2 U$37.7 U$37.8
N$79: R28.1 U$36.7 U$36.8
N$80: R4.2 U$37.5 U$37.6
N$81: R7.1 U$36.5 U$36.6
N$82: IRLZ44N.1 R51.2 R52.2
N$83: R9.1 U$26.2 U$27.P$1
N$84: JP2.1 R51.1
N$85: R30.2 R32.1 SI2302CDS.1
N$86: R10.2 U$29.2 U$30.P$1
N$87: JP3.2 SI2302CDS.3
N$88: R28.2 R31.2 U$6.2
N$89: JP3.1 R30.1
N$90: 3362P3.3 R43.1
N$91: JP4.1 R36.1 X3.2
N$92: R37.2 X3.1
N$93: 3362P3.1 R44.2
N$94: 3362P3.2 U$43.P$1 U$52.1
N$95: R40.2 R41.2 U$35.2 U$35.4 U$38.3
N$96: R43.2 U$39.1 U$42.P$1
N$97: R44.1 U$40.2 U$41.P$1
N$98: 3362P5.3 R45.1
N$99: 3362P5.1 R46.2
N$100: 3362P5.2 OPA1.P$4 U$48.P$1
N$101: R45.2 U$44.1 U$47.P$1
N$102: R46.1 U$45.2 U$46.P$1
N$103: PWR1.A R50.2
N$104: 3362P7.1 R48.1
N$105: 3362P7.2 OPA1.P$3 U$51.P$1
N$106: 3362P7.3 R47.2
N$107: COM.1 R33.1 X2.1
N$108: R47.1 U$49.2 U$50.P$1
N$109: R48.2 U$52.2 U$53.P$1
N$110: IRLZ44N.3 R52.1 X5.1
N$111: X1.2 X5.2
N$112: C3.2 R53.2 U1.2 U1.6
N$113: R53.1 VR1.2 VR1.3
N$114: R63.1 U1.3 VR1.1
N$115: R63.2 RT1.2
N$116: C14.1 RT1.3 U$8.P$2 U$56.P$1 U$59.P$2
N$117: C15.1 U$56.P$2 U$57.P$1
N$118: C14.2 U$57.P$2 U$58.P$1
N$119: C13.P$1 R65.1 R66.1 U$58.P$2
N$120: D4.A D5.C
N$121: D3.A D4.C
N$122: D2.A D3.C
N$123: D1.A D2.C
N$124: D1.C R65.2
N$125: R66.2 R67.2
N$126: R67.1 R68.1
N$127: R68.2 R69.2
N$128: R69.1 R70.1
N$129: DOSE.P$1 R70.2
N$130: R61.2 R62.1 SI2302-1.1
N$131: R59.2 R60.1 SI2302-2.1
N$132: R57.1 R58.2 SI2302-3.1
N$133: R55.2 R56.1 SI2302-4.1
N$134: C17.1 DOSE.P$2 R72.2 RT2.2
N$135: C18.2 R78.2 U2.2 U2.6
N$136: R78.1 VR2.2 VR2.3
N$137: R91.1 U2.3 VR2.1
N$138: R91.2 RT3.2
N$139: C21.1 RT3.3 U$60.P$2 U$61.P$1 U$64.P$2
N$140: C22.1 U$61.P$2 U$62.P$1
N$141: C21.2 U$62.P$2 U$63.P$1
N$142: C20.P$1 R92.1 R93.1 U$63.P$2
N$143: D9.A D10.C
N$144: D8.A D9.C
N$145: D7.A D8.C
N$146: D6.A D7.C
N$147: C9.1 INA219#1.1 R73.2
N$148: D6.C R92.2
N$149: R93.2 R94.2
N$150: C10.1 INA219#2.1 R76.2
N$151: C10.2 INA219#2.2 R77.2
N$152: R94.1 R95.1
N$153: R95.2 R96.2
N$154: R96.1 R97.1
N$155: DOSE1.P$1 R97.2
N$156: R89.2 R90.1 SI2302-5.1
N$157: R87.2 R88.1 SI2302-8.1
N$158: R85.1 R86.2 SI2302-7.1
N$159: PWR.C R82.2
N$160: R83.2 R84.1 SI2302-6.1
N$161: C23.1 DOSE1.P$2 R98.2 RT4.2
N$162: BUZZER.P$1 SI2302CDS1.3
N$163: PWR4.C R109.2
N$164: IC1.41 R108.1
N$165: PB5.C R108.2
N$166: R104.1 R106.1 TOMA.1
N$167: IC1.18 R104.2
N$168: R99.2 R100.2 SI2302CDS1.1
NRST: IC2.7 R79.2 U$12.P$11
NRST1: C33.1 IC1.7 JP5.5 R110.2 RESET.1
PB1-BUZZER: IC1.19 R99.1
PFI-C: IC2.29 PFI-C.A R14.C.2 U$2.6
PFI-D: IC2.40 PFI-D.A R14.D.2 U$5.6
PGB-C: IC2.27 PGB-C.A U$2.16
PGB-D: IC2.42 PGB-D.A U$5.16
PGS-C: IC2.28 PGS-C.A U$2.15
PGS-D: IC2.43 PGS-D.A U$5.15
ROZE-1: IC2.15 R2.1 ROZE1.1
ROZE-2: IC2.16 R6.1 ROZE2.1
ROZE-3: IC2.17 R8.1 ROZE3.1
ROZE-4: IC2.18 R49.1 ROZE4.1
RX-S: IC2.31 U$12.P$4
SCL: IC2.21 INA219#1.5 INA219#2.5 R101.2
SCLTM: IC2.45 JP1.13
SDA: IC2.22 INA219#1.6 INA219#2.6 R102.2
SDATM: IC2.46 JP1.14
SPI1_CS_BME280: BME280.2 IC1.2
SPI1_CS_LSM6DS3: IC1.3 LSM6DS3.P$2
SPI1_CS_NRF24LO1: GT-24-NRF24LO1.3 IC1.4
SPI1_MISO: BME280.5 GT-24-NRF24LO1.6 IC1.16 LSM6DS3.P$1
SPI1_MOSI: BME280.3 GT-24-NRF24LO1.5 IC1.17 LSM6DS3.P$3
SPI1_SCK: BME280.4 GT-24-NRF24LO1.4 IC1.15 LSM6DS3.P$4
SPI2_CS_SD: IC1.25 SD.DAT3
SPI2_MISO: IC1.27 R105.1 SD.DAT0
SPI2_MOSI: IC1.28 SD.CMD
SPI2_SCK: IC1.26 SD.CLK
SWC: IC2.37 R27.2 U$12.P$10
SWC1: IC1.37 JP5.2 R103.2
SWD: IC2.34 R64.2 U$12.P$8
SWD1: IC1.34 JP5.3 R107.2
TIME: IC2.13 JP1.15
TX-S: IC2.30 U$12.P$6
USART3_RX: GOOUUUATGM336H.3 IC1.22
USART3_TX: GOOUUUATGM336H.2 IC1.21
VALVE: DEVICE.5 R56.2
VALVE1: DEVICE1.5 R84.2
VB-C: C2A.C.1 C2B.C.1 R12.C.1 U$2.12 U$2.29 U$23.P$2
VB-D: C2A.D.1 C2B.D.1 R12.D.1 U$5.12 U$5.29 U$55.P$2
VBO-C: L1.C.P$2 U$2.14
VBO-D: L1.D.P$2 U$5.14
VCC-C: C3.C.1 R14.C.1 R15.C.2 R16.C.2 R17.C.2 U$2.2
VCC-D: C3.D.1 R14.D.1 R15.D.2 R16.D.2 R17.D.2 U$5.2
VIN-C: C1.C.2 D$1.P$2 R1.C.1 R9.C.1 R11.C.2 U$1.P$2 U$2.11 U$2.30
VIN-D: C1.D.2 D$2.P$2 R1.D.1 R9.D.1 R11.D.2 U$5.11 U$5.30 U$54.P$2
Y: INVERT1.P$4 R1.1

## Tracks (layer width: path | path; a pad name or v marks a point on that pad's centre or on a via)
0V8
  Top 0.3: U$32.P$1 3362P.2 67.25,7.88 69.23,9.87 72.32,9.87 73.55,11.1 OPA2.P$3
1W
  Top 0.25: IC2.14 8.28,43.52 8.98,43.52 9.28,43.81 9.28,45.59 4.2,50.66 4.2,53.11 6.69,55.6 7.64,55.6 17.8,65.75 20.55,65.75 22.77,67.97 22.77,76.48 28.03,81.74 28.03,83.64 29.12,84.73 35.1,84.73 35.74,84.09 35.74,82.55 JP1.7
3V1
  pour Top: 0,134 45.6,134 45.6,96.2 0,96.2
3V2  (via drill 0.4, 0.5)
  Top 0.3: IC1.9 94.12,116.19 94.33,115.98 94.87,115.98 C28.1 96.11,115 99.85,111.26 R110.1 99.85,105 100,104.85 | C30.1 88.45,127.1 IC1.36 90.12,123.85 90.97,123 | IC1.48 87.67,118.43 | 87.67,118.43 87.43,118.67 C25.1 | 90.97,123 94.27,123 95.2,123.93 IC1.24 98.79,125.6 C29.1 | IC1.1 90.12,122.15 90.97,123 | IC1.1 89.96,116.93 89.3,116.27 88.7,116.27 88.27,116.7 88.27,117.83 87.67,118.43 | C26.1 83.1,117.35 PWR4.A 80.75,126.74 PB5.A | BME280.6 115.92,102.7 115.59,102.38 114.95,102.38 114.62,102.7 BME280.8 112.08,102.97 C27.2 111.06,103.15 109.21,105 106.6,105 104.3,102.7 | LSM6DS3.P$6 108.92,123 BUZZER.P$2 | JP5.4 93.19,105.5 93.19,106.84 91.9,108.13 91.9,112.71 90.12,114.49 IC1.1
  Top 0.5: C25.1 85.21,118.67 C26.1 | C30.1 C31.1 | R106.2 117.29,97.08
  Top 0.8: v117.5,98.4 117.5,97.29 117.29,97.08 | v131,108 125.68,108 | 117.5,95.65 122.97,95.65 125.68,98.36 125.68,108 | 117.5,95.65 111.35,95.65 104.3,102.7 102.15,104.85 R103.1 100,104.85 R107.1 96.43,104.85 96.39,104.81 96.24,104.81 JP5.4 87.13,103.63 79.78,96.28 GOOUUUATGM336H.5 | R106.2 117.5,96.92 117.5,95.65 | 125.68,108 125.68,127.02 122.34,130.35 GT-24-NRF24LO1.1 118.47,130.35 117.02,128.91 117.02,128.02 BUZZER.P$2
  Bottom 0.3: 116.5,102.5 C24.2
  Bottom 0.5: SD.VDD 131,109.66
  Bottom 0.8: v117.5,98.4 117.5,102.5 | C24.2 117.35,102.35 117.5,102.5 | SD.VDD 131.11,108.11 v131,108 | LP5907MFX-3.3.5 117.5,104.01 117.5,102.5
3V3  (via drill 0.35, 0.4)
  Top 0.25: 13.6,81.17 12.9,80.47 INA219#2.7 12.9,79.44 14.2,78.14 INA219#2.4 | INA219#1.4 15.75,80.17 14.74,81.17 13.6,81.17 | U$40.1 37.88,20.38 33.77,20.38 33.58,20.57 33.58,21.65 32.61,22.61 28.64,22.61 22.7,28.55 | C6.1 11.25,47.55 IC2.9 11.25,44.67 10.58,44 v10,44 | v3.8,41.3 3,41.3 | 3,41.3 R101.1 | 3,41.3 R102.1 | C2.2 15.1,53.23 TCXO.P$1 TCXO.P$4 15.18,50.58 v15.25,50.5 | R49.2 R8.2 9.35,19 | R64.1 R79.1 | R79.1 R27.1 18.29,29.15 19.11,28.32 20.48,28.32 20.68,28.52 22.68,28.52 22.7,28.55 | LED.A 3.6,34.05 v2.8,34.05 4.7,35.95 C7.1 5.05,38.5 IC2.24 14.46,38.5 15.22,37.73 15.22,37.02 IC2.36 15.47,37 v16.22,36.25 16.22,35.47 C8.1 | 22.7,28.55 22.73,28.57 22.73,29.91 PWR.A | OPA3.P$5 32.8,53.95 v33.25,53.5 | 32.75,44 32.75,44.62 v32.81,44.69 | LD1117S33.P$3 6.26,67.45 1.43,72.28 1.43,78.47 4.65,81.7 13.07,81.7 13.6,81.17 | v15.75,46.75 15.25,46.25 IC2.1 15.25,44.5 15.75,44 IC2.48 18.55,44 C5.1 18.9,48.08 18.4,48.58 18.4,60.51 19.52,61.62 25.64,61.62 27.44,59.82 27.44,54.76 v28.75,53.45 | R79.1 15.5,29.05 v15.5,28 | R2.2 R6.2 9.35,19 | v2.75,19.75 3.5,19 9.35,19
  Top 0.3: INVERT1.P$5 30.5,44.75 31.25,44 32.75,44 34,44 OPA1.P$5 | R11.2 62.85,5.15 U$31.P$1 65.65,2.35 67.62,2.35 68.83,3.55 68.83,8.76 69.27,9.2 OPA2.P$5
  Top 0.6: LD1117S33.P$3 7.83,67.45 3.45,63.07 C4.P+ v1.45,61.15 | v6.3,51.65 7.75,51.65 C16.1 8.05,49.61 9.76,47.9 C6.1
  Bottom 0.25: v3.8,41.3 0.65,41.3 | v33.25,53.5 29.25,53.5 | 29.25,53.5 28.8,53.5 v28.75,53.45 | v32.81,44.69 29.25,44.69 29.25,53.5 | v15.25,50.5 15.25,47.25 | 15.25,47.25 v15.75,46.75 | v10,44 13.25,47.25 15.25,47.25 | v15.5,28 15.5,28.2 16.2,28.9 16.2,30.81 15.28,31.73 15.28,35.3 v16.22,36.25 | v2.75,19.75 0.65,19.75 | v13,4.25 13.25,4 13.25,0.65
  Bottom 0.6: U$31.P$1 64.75,0.65 13.25,0.65 12.13,0.65 6.13,6.65 0.65,6.65 0.65,19.75 0.65,34.05 | v1.45,61.15 0.65,61.15 0.65,51.65 | 0.65,34.05 0.65,41.3 0.65,51.65 | v2.8,34.05 0.65,34.05 | v6.3,51.65 0.65,51.65
  other vias: 14,5.25 13,5.25 14,4.25
  pour Top (no thermals): 12.7,7.4 14.4,7.4 14.4,3.75 12.7,3.75
  pour Bottom (no thermals): 12.7,7.4 14.4,7.4 14.4,0.3 12.7,0.3
3V7
  Bottom 0.3: LP5907MFX-3.3.1 113.99,103.92 112.23,103.92 C32.2 112.03,104.95 112.98,105.91 LP5907MFX-3.3.3
  Bottom 0.8: LP5907MFX-3.3.3 114.88,105.91 119.47,110.5 SWITCH1.TO2
3V7-OUT
  Top 0.8: X6.1 109.15,104 111.53,101.62 119.77,101.62 122.5,104.35 122.5,106.65 121.15,108 SWITCH1.FROM
5V1  (via drill 0.35)
  Top 0.5: U$59.P$1 98,34.28 v98,23 | v98,23 98,13 95.65,10.65 C12.P$2 | R54.1 84.61,46.1 84.61,23 | 84.61,23 84.61,16.55 84.6,16.55 85.47,15.67 U1.4 | v98,23 v88.5,23 | v84.73,23 84.61,23
  Top 0.6: U1.8 89.42,9.83 89.75,9.5 95.22,9.5 C12.P$2
  Bottom 0.5: v88.5,23 v84.73,23 | PWR2.2 103.07,79.53 103.07,28.07 v98,23
  cutout Top: 84,78.5 87.5,78.5 87.5,75 84,75
5V2
  cutout Top: 84,3.7 87.5,3.7 87.5,0.2 84,0.2
5V3  (via drill 0.35)
  Top 0.5: R80.1 113.61,32.1 113.61,22.62 v114.47,21.75 U2.4 | C19.P$2 124.65,12.15 127,14.5 127,20 125.27,21.73 U$64.P$1 122.27,20 118.5,20 v117.5,19 | BUZZ.P$2 v132.07,62
  Top 0.6: U2.8 118.42,11.33 118.75,11 124.22,11 C19.P$2
  Bottom 0.5: PWR3.2 132.07,79.53 v132.07,62 132.07,29.8 U$64.P$1 | v114.47,21.75 117.23,19 v117.5,19
  cutout Top: 113,78.5 116.5,78.5 116.5,75 113,75
5V4
  cutout Top: 113,3.8 116.5,3.8 116.5,0.3 113,0.3
A
  Top 0.3: 31.25,42.2 29.8,42.2 29.55,41.95 | 31.25,42.2 OPA1.P$1 | U$49.1 36.95,31.55 36.95,31.95 36.65,32.25 33.81,32.25 32.95,31.39 32.95,30.55 32.74,30.35 29.75,30.35 29.55,30.55 29.55,41.95 | INVERT1.P$2 31.25,42.2 | R38.2 31.1,45.75 30.12,45.75 29.55,45.18 29.55,41.95
AGND  (via drill 0.35)
  Top 0.25: R19.D.2 R18.D.2 62.1,64.1 R6.D.2 | C6.D.2 C3.D.2 C7.D.2 R10.D.2 R13.D.1 45.15,63.26 44.33,62.44 44.33,61.06 45.15,60.24 C8.D.2 R7.D.1 | R19.C.2 R18.C.2 58.9,27.9 | C6.C.2 C3.C.2 C7.C.2 R10.C.2 R13.C.1 75.85,28.74 76.67,29.57 76.67,30.93 75.85,31.76 C8.C.2 R7.C.1 | OPA3.P$2 31.25,55.75 v31.75,55.25 | U$39.2 v36.25,12 | v75.75,10.75 75.75,10.15 OPA2.P$2 | v35.5,40.9 35.5,41.95 OPA1.P$2 35.75,42.66 35.25,43.16 32.06,43.16 INVERT1.P$3 | U$44.2 v40.5,32 | U$16.1 v40.5,78 | U$20.2 52.25,2.5 v52.25,1.75
  Top 0.3: 69.75,3.06 U$33.P$1 73.95,7.45 R12.1
  other vias: 64.25,62 65.25,62 65.25,63 64.25,63 64.25,64 65.25,64 43.75,71 43.75,72 43.75,70 43.75,68 43.75,69 43.75,67 43.75,65 43.75,66 43.75,64 43.75,62 43.75,61 43.75,59 43.75,60 43.75,58 43.75,56 43.75,57 43.75,55 43.75,54 44.75,56 44.75,55 44.75,54 45.75,56 45.75,55 45.75,54 46.75,56 46.75,55 46.75,54 47.75,56 47.75,55 47.75,54 48.75,54 56.75,30 55.75,30 55.75,29 56.75,29 56.75,28 55.75,28 77.25,21 77.25,20 77.25,22 77.25,24 77.25,23 77.25,25 77.25,27 77.25,26 77.25,28 77.25,30 77.25,29 77.25,31 77.25,33 77.25,32 77.25,34 77.25,36 77.25,35 77.25,37 77.25,38 76.25,36 76.25,37 76.25,38 75.25,36 75.25,37 75.25,38 74.25,36 74.25,37 74.25,38 73.25,36 73.25,37 73.25,38 72.25,38
  pour Top (rank 3, no thermals): 52,63.75 52,63.25 51,63.25 51,53.35 43,53.35 43,73.25 46.25,73.25 46.25,63.75
  pour Top (no thermals): 60.25,64.75 66,64.75 66,61.25 60.25,61.25
  pour Top (rank 3, no thermals): 69,28.25 69,28.75 70,28.75 70,38.65 78,38.65 78,18.75 74.75,18.75 74.75,28.25
  pour Top (no thermals): 60.75,27.25 55,27.25 55,30.75 60.75,30.75
  pour Bottom (rank 3, no thermals): 43,76.5 58.25,76.5 58.25,68.75 65.75,68.75 65.75,53.25 43.5,53.25 43.5,38.7 78,38.7 78,15.5 64.5,15.5 64.5,23.25 43.5,23.25 43.5,12.25 78,12.25 78,0 29.5,0 29.5,79.5 43,79.5
BMS1
  Top 0.25: JP1.1 28.67,81.1 23.73,76.16 23.73,67.65 20.93,64.85 18.17,64.85 8.02,54.7 7.06,54.7 5.1,52.74 5.1,51.04 9.71,46.42 10.04,46.42 10.25,46.21 IC2.11
BMS2
  Top 0.25: IC2.12 9.75,45.75 4.65,50.85 4.65,52.92 6.87,55.15 7.83,55.15 17.98,65.3 20.74,65.3 23.27,67.83 23.27,76.34 28.48,81.55 28.48,82.55 JP1.2
BMS3
  Top 0.25: IC2.4 13.75,47.14 16.05,49.44 16.05,61.46 18.54,63.95 21.31,63.95 24.62,67.26 24.62,75.78 28.41,79.56 30.65,79.56 32.11,81.02 JP1.3
BMS4
  Top 0.25: JP1.4 30.66,82.19 30.66,80.2 30.47,80.01 28.22,80.01 24.18,75.97 24.18,67.46 21.11,64.4 18.35,64.4 8.2,54.25 7.25,54.25 5.55,52.55 5.55,51.22 9.9,46.88 10.22,46.88 10.75,46.35 IC2.10
BMS5
  Top 0.25: IC2.2 14.75,46.87 16.95,49.07 16.95,61.09 18.91,63.05 21.69,63.05 25.52,66.89 25.52,75.41 28.78,78.66 31.85,78.66 34.28,81.1 JP1.5
BMS6
  Top 0.25: JP1.6 33.2,82.19 33.2,80.65 31.66,79.11 28.59,79.11 25.07,75.6 25.07,67.08 21.5,63.5 18.73,63.5 16.5,61.27 16.5,49.25 14.25,47 IC2.3
BMS+  (via drill 0.35)
  Top 0.25: R76.1 12.7,70.4 R75.2 | v27.13,70.35 29.6,70.35 33.94,74.69 38.06,74.69 38.63,74.11 38.63,69.12 37.75,68.24 U$14.1
  Top 0.6: LD1117S33.P$4 4.04,73.65 C11.P+
  Top 0.8: C11.P+ 4.09,73.65 4.99,74.55 7.71,74.55 8.15,74.11 8.15,72.22 9.97,70.4 R75.2
  Bottom 0.25: v27.13,70.35 26.08,71.4 23,71.4
  Bottom 1.4: SWITCH.2 23,71.4 23,70.4 v15.75,70.4
  other vias: 13.75,70.4 14.75,70.4 15.75,69.4 14.75,69.4 13.75,69.4 13.75,71.4 14.75,71.4 15.75,71.4
  pour Bottom (no thermals): 13.05,68.85 16.5,68.85 16.5,71.95 13.05,71.95
  pour Top (no thermals): 11.3,68.85 11.3,71.95 16.5,71.95 16.5,68.85
BMS+_OUT
  Bottom 1.4: SWITCH.1 23,86.6 37.19,86.6 JP1.8
BUS+  (via drill 0.35)
  Top 0.25: R73.1 17.3,86.7 R71.2 | v43,1.75 U$21.1 | v36.5,40.5 U$45.1 | U$15.2 36.67,68.42 36.67,68.06 36.48,67.88 33.52,67.88 32.67,68.72 32.67,69.44 32.11,70 v31.25,70
  Bottom 0.25: v43,1.75 43,1.27 29.25,1.27 29.25,33.58 28.12,34.71 28.12,35.29 28.8,35.97 28.8,40.15 | 29.25,70.25 29.25,79.75 37.38,79.75 38.5,80.87 38.5,87.7 39,88.2 | 29.25,70.25 29.25,55 28.05,53.8 28.05,52.95 28.8,52.2 28.8,40.15 | 28.8,40.15 36.15,40.15 v36.5,40.5 | 29.25,70.25 31,70.25 v31.25,70
  Bottom 1.4: JP1.16 47.35,88.2 39,88.2 22.25,88.2 21.25,87.2 v16.25,87.2
  other vias: 15.25,87.2 14.25,88.2 15.25,88.2 16.25,88.2 14.25,87.2 16.25,86.2 15.25,86.2 14.25,86.2
  pour Bottom (no thermals): 16.95,88.75 13.5,88.75 13.5,85.65 16.95,85.65
  pour Top (no thermals): 18.7,88.75 18.7,85.65 13.5,85.65 13.5,88.75
BUZZER
  Top 0.3: R62.2 88.82,79.41 88.82,71.74 DEVICE.2
BUZZER1
  Top 0.3: R90.2 117.82,79.41 117.82,71.74 DEVICE1.2
C-OFF  (via drill 0.35)
  Top 0.25: IC2.19 9.25,41 v10,41.75 | v23.75,41.75 23.75,42.11 25.38,43.74 25.38,49 27.07,50.7 32.2,50.7 R3.1
  Bottom 0.25: v23.75,41.75 23,41 10.75,41 v10,41.75
CE-NRF24LO1  (via drill 0.35)
  Top 0.25: IC1.29 93.62,124.08 v93.97,123.73
  Top 0.3: GT-24-NRF24LO1.2 118.58,129.09 v118,128.5
  Bottom 0.3: v93.97,123.73 94.62,123.73 96.92,121.43 98.96,121.43 99.98,122.46 99.98,123.16 94.87,128.27 93.7,128.27 93.27,128.7 93.27,130.3 94,131.03 95.82,131.03 97,132.21 97,132.7 115.89,132.7 118,130.59 v118,128.5
D-OFF  (via drill 0.35)
  Top 0.25: R39.2 29.15,50.25 27.26,50.25 25.82,48.81 25.82,42.73 v23.75,40.65 | v10,40.5 IC2.20
  Bottom 0.25: v23.75,40.65 23.6,40.5 v10,40.5
DC-DC  (via drill 0.35)
  Top 0.25: R42.2 38.53,35.13 31.11,35.13 v30.98,35 | IC2.38 24.82,39 v28.82,35
  Top 0.3: R42.2 40.65,39.35 U$38.1
  Bottom 0.25: v28.82,35 v30.98,35
DOZIMETR  (via drill 0.35)
  Top 0.3: v89.5,46.5 89.03,46.5 C17.2
  Top 0.5: C17.2 86.44,49.09 R54.2 85.89,51.4 RT2.3
  Bottom 0.3: DEVICE.1 87.25,71.75 89,73.5 98.5,73.5 100.2,71.8 100.2,45.35 96.92,42.07 93.98,42.07 89.55,46.5 v89.5,46.5
DOZIMETR1  (via drill 0.35)
  Top 0.3: v118.5,32.5 118.03,32.5 C23.2
  Top 0.5: C23.2 115.44,35.09 R80.2 114.89,37.4 RT4.3
  Bottom 0.3: DEVICE1.1 116.25,71.75 118,73.5 127.5,73.5 129.2,71.8 129.2,31.35 125.92,28.07 122.98,28.07 118.55,32.5 v118.5,32.5
DVIG
  Top 0.3: R57.2 95.32,71.22 DEVICE.4
DVIG1
  Top 0.3: R85.2 124.32,71.22 DEVICE1.4
FBB-C  (via drill 0.35)
  Top 0.25: U$2.22 63.35,26 v63.2,25.85 | v76.75,10.75 R15.2
  Bottom 0.25: v63.2,25.85 63.2,23.55 43.45,23.55 43.45,11.95 76.75,11.95 v76.75,10.75
FBB-D  (via drill 0.35)
  Top 0.25: U$5.22 57.65,66 v57.8,66.15 | R25.2 35.85,57.89 40.95,52.79 40.95,50.3 40.29,49.63 v40.25,49.63
  Bottom 0.25: v57.8,66.15 57.8,67.5 59.15,68.85 65.75,68.85 66.1,68.5 66.1,57.6 69.35,54.35 69.35,46.5 68.3,45.45 64.06,45.45 60.98,48.52 54.1,48.52 51.48,51.15 41.81,51.15 40.29,49.63 v40.25,49.63
GND  (via drill 0.35, 0.4)
  Top 0.25: U$5.28 53.75,70.35 C4A.D.1 54.35,71.15 C2B.D.2 54.35,76.05 C2A.D.2 | U$2.28 67.25,21.65 C4A.C.1 66.65,20.85 66.65,15.95 C2A.C.2 | INA219#1.3 16.4,79 v17.05,78.35 INA219#1.7 17.05,76.84 16.73,76.53 13.87,76.53 13.55,76.84 INA219#2.3 13.55,78.14 12.25,79.44 INA219#2.8 v12.25,81 | v42.25,39.75 42,39.5 U$38.2 42,37.6 R42.1 | IC2.35 14.75,33.25 14.65,33.15 | C2.1 13.4,53.23 TCXO.P$2 11.18,51.62 C16.2 10.9,51.9 C6.2 11.75,48.75 IC2.8 11.75,44.18 v11.57,44 | R82.1 v19.8,32 | v3,36.75 C7.2 3.85,39 IC2.23 9.8,39 v10,39.2 | 42.27,78 42.27,78.25 | R16.1 v19.01,18 | R17.1 19.61,14.5 v19.05,15.05 | R18.1 v19,11 | C8.2 14.65,33.15 | 14.65,33.15 v14.5,33 | IC2.44 16.04,42 15.82,42.22 15.82,43.28 16.04,43.5 IC2.47 19.75,43.5 C5.2 20.6,47.01 18.88,48.74 18.88,55.87 20.15,57.15 R26.1 20.15,59.6 | R23.1 20.15,52.6 v20.25,52.5 | v19.1,59.6 20.15,59.6 | 20.15,59.6 R24.1 | U$37.1 43.71,51.66 45.25,50.12 v45.25,50 44.37,49.12 U$37.3
  Top 0.3: U$36.3 v79.25,42.65 | U$36.1 v79.25,40.09 v79.25,40.1
  Top 0.4: INA219#1.8 INA219#1.7
  Top 0.6: 6.65,62.5 6.65,63.86 LD1117S33.P$2 8.07,65.16 | 6.65,62.5 C4.P- 5.25,59.75 v2.15,59.75 | 6.45,73.65 C11.P- 6.6,73.65 v6.6,72.6 | 6.65,62.5 v8,62.5 | 15,68 v15,66.8 | 10.5,86.5 10.5,86.2 v9.4,86.2 | 10.5,75 v9.4,75 | 19.5,83 19.5,83.5 v18.5,83.5
  Top 1: 19.5,69 19.5,68 15,68 10.5,68 10.5,69 | 10.5,83 10.5,86.5 10.5,89.5 | 10.5,72 10.5,75 10.5,80.5 | 14,89.5 19.5,89.5 19.5,83 19.5,72
  Top 1.4: JP1.12 JP1.11 42.27,78.25 v51.25,78.25
  Bottom 0.25: v42.25,39.75 44.5,39.75 52.31,47.56 56.32,47.56 59.63,44.25 67.73,44.25 69.8,46.32 69.8,54.53 69.25,55.08 v69.25,74.25
  other vias: 49.25,79.25 50.25,79.25 51.25,79.25 52.25,79.25 53.25,79.25 54.25,79.25 55.25,78.25 56.25,78.25 57.25,78.25 58.25,78.25 59.25,78.25 60.25,78.25 55.25,79.25 56.25,79.25 57.25,79.25 58.25,79.25 59.25,79.25 60.25,79.25 55.25,77.25 56.25,77.25 57.25,77.25 58.25,77.25 59.25,77.25 60.25,77.25 61.25,78.25 62.25,78.25 63.25,78.25 64.25,78.25 65.25,78.25 66.25,78.25 61.25,79.25 62.25,79.25 63.25,79.25 64.25,79.25 65.25,79.25 66.25,79.25 61.25,77.25 62.25,77.25 63.25,77.25 64.25,77.25 65.25,77.25 66.25,77.25 52.25,78.25 53.25,78.25 54.25,78.25 59.25,75.25 60.25,75.25 59.25,76.25 60.25,76.25 59.25,74.25 60.25,74.25 61.25,75.25 62.25,75.25 63.25,75.25 64.25,75.25 61.25,76.25 62.25,76.25 63.25,76.25 64.25,76.25 65.25,76.25 66.25,76.25 61.25,74.25 62.25,74.25 63.25,74.25 64.25,74.25 67.25,78.25 68.25,78.25 69.25,78.25 67.25,79.25 68.25,79.25 69.25,79.25 67.25,77.25 68.25,77.25 69.25,77.25 67.25,76.25 68.25,76.25 69.25,76.25 69.25,75.25 70.75,12.75 69.75,12.75 68.75,12.75 67.75,12.75 66.75,12.75 65.75,13.75 64.75,13.75 63.75,13.75 62.75,13.75 61.75,13.75 60.75,13.75 65.75,12.75 64.75,12.75 63.75,12.75 62.75,12.75 61.75,12.75 60.75,12.75 65.75,14.75 64.75,14.75 63.75,14.75 62.75,14.75 61.75,14.75 60.75,14.75 59.75,13.75 58.75,13.75 57.75,13.75 56.75,13.75 55.75,13.75 54.75,13.75 59.75,12.75 58.75,12.75 57.75,12.75 56.75,12.75 55.75,12.75 54.75,12.75 59.75,14.75 58.75,14.75 57.75,14.75 56.75,14.75 55.75,14.75 54.75,14.75 69.75,13.75 68.75,13.75 67.75,13.75 66.75,13.75 63.75,16.75 62.75,16.75 61.75,16.75 60.75,16.75 63.75,15.75 62.75,15.75 61.75,15.75 60.75,15.75 63.75,17.75 62.75,17.75 61.75,17.75 60.75,17.75 59.75,16.75 58.75,16.75 57.75,16.75 56.75,16.75 59.75,15.75 58.75,15.75 57.75,15.75 56.75,15.75 55.75,15.75 54.75,15.75 59.75,17.75 58.75,17.75 57.75,17.75 56.75,17.75 53.75,13.75 52.75,13.75 51.75,13.75 53.75,12.75 52.75,12.75 51.75,12.75 53.75,14.75 52.75,14.75 51.75,14.75 53.75,15.75 52.75,15.75 51.75,15.75 51.75,16.75 51.75,17.75 16,5.25 15,5.25 15,4.25 16,4.25 18,5.25 17,5.25 17,4.25 18,4.25 20,5.25 19,5.25 19,4.25 20,4.25 21,5.25 21,4.25 71.75,12.75
  pour Top (rank 3, no thermals): 53.5,66 54,66 54,68.75 55.5,70.25 55.5,73.5 70.75,73.5 70.75,78.75 69.75,79.75 43,79.75 43,77.25 43.75,76.5 53.5,76.5
  pour Top (rank 3, no thermals): 67.5,26 67,26 67,23.25 65.5,21.75 65.5,18.5 50.25,18.5 50.25,13.25 51.25,12.25 78,12.25 78,14.75 77.25,15.5 67.5,15.5
  pour Top (rank 2, no thermals): 14.6,7.4 21.5,7.4 21.5,3.75 14.6,3.75
  pour Bottom (rank 4, no thermals): -0.25,92.25 -0.25,-0.25 82.25,-0.25 82.25,92.25
GND1  (via drill 0.35)
  Top 0.5: SI2302CDS.2 7.85,120.25 R32.2
  Top 0.75: PWR1.C v32.7,98.2
  Top 1: R32.2 v7.75,119 | R36.2 v38.5,112.25
  pour Bottom: 0,134 45.6,134 45.6,96.2 0,96.2
GND2  (via drill 0.35)
  Top 0.3: v85,6.75 C3.1 | 97.66,81.12 97.5,81.12
  Top 0.5: SI2302-2.2 92.36,77.78 R59.1 | SI2302-3.2 95.54,77.64 R58.1 | SI2302-4.2 98.62,77.48 R55.1 98.53,77.34 100.02,75.85 100.02,70.22 98.06,68.26 96.06,68.26 94.06,66.26 C13.P$2 94.06,64.97 C15.2 | SI2302-1.2 88.41,82.25 R61.1 | U1.1 89.28,12.76 v88.52,11.98 | U$8.P$1 84.6,64 84.6,55.51 RT2.1